# Altium PCB pcb.PcbDoc (part 1 of 6)
Units mm, origin at the board's own origin, x right, y up, seen from the top; angles counter-clockwise.
Board outline 163.6 x 137.4 mm, 4 copper layers (Top Layer, GND2, GND3, Bottom Layer), stack 1.586 mm thick; 362 components, 323 nets, 1261 pads, 657 vias.
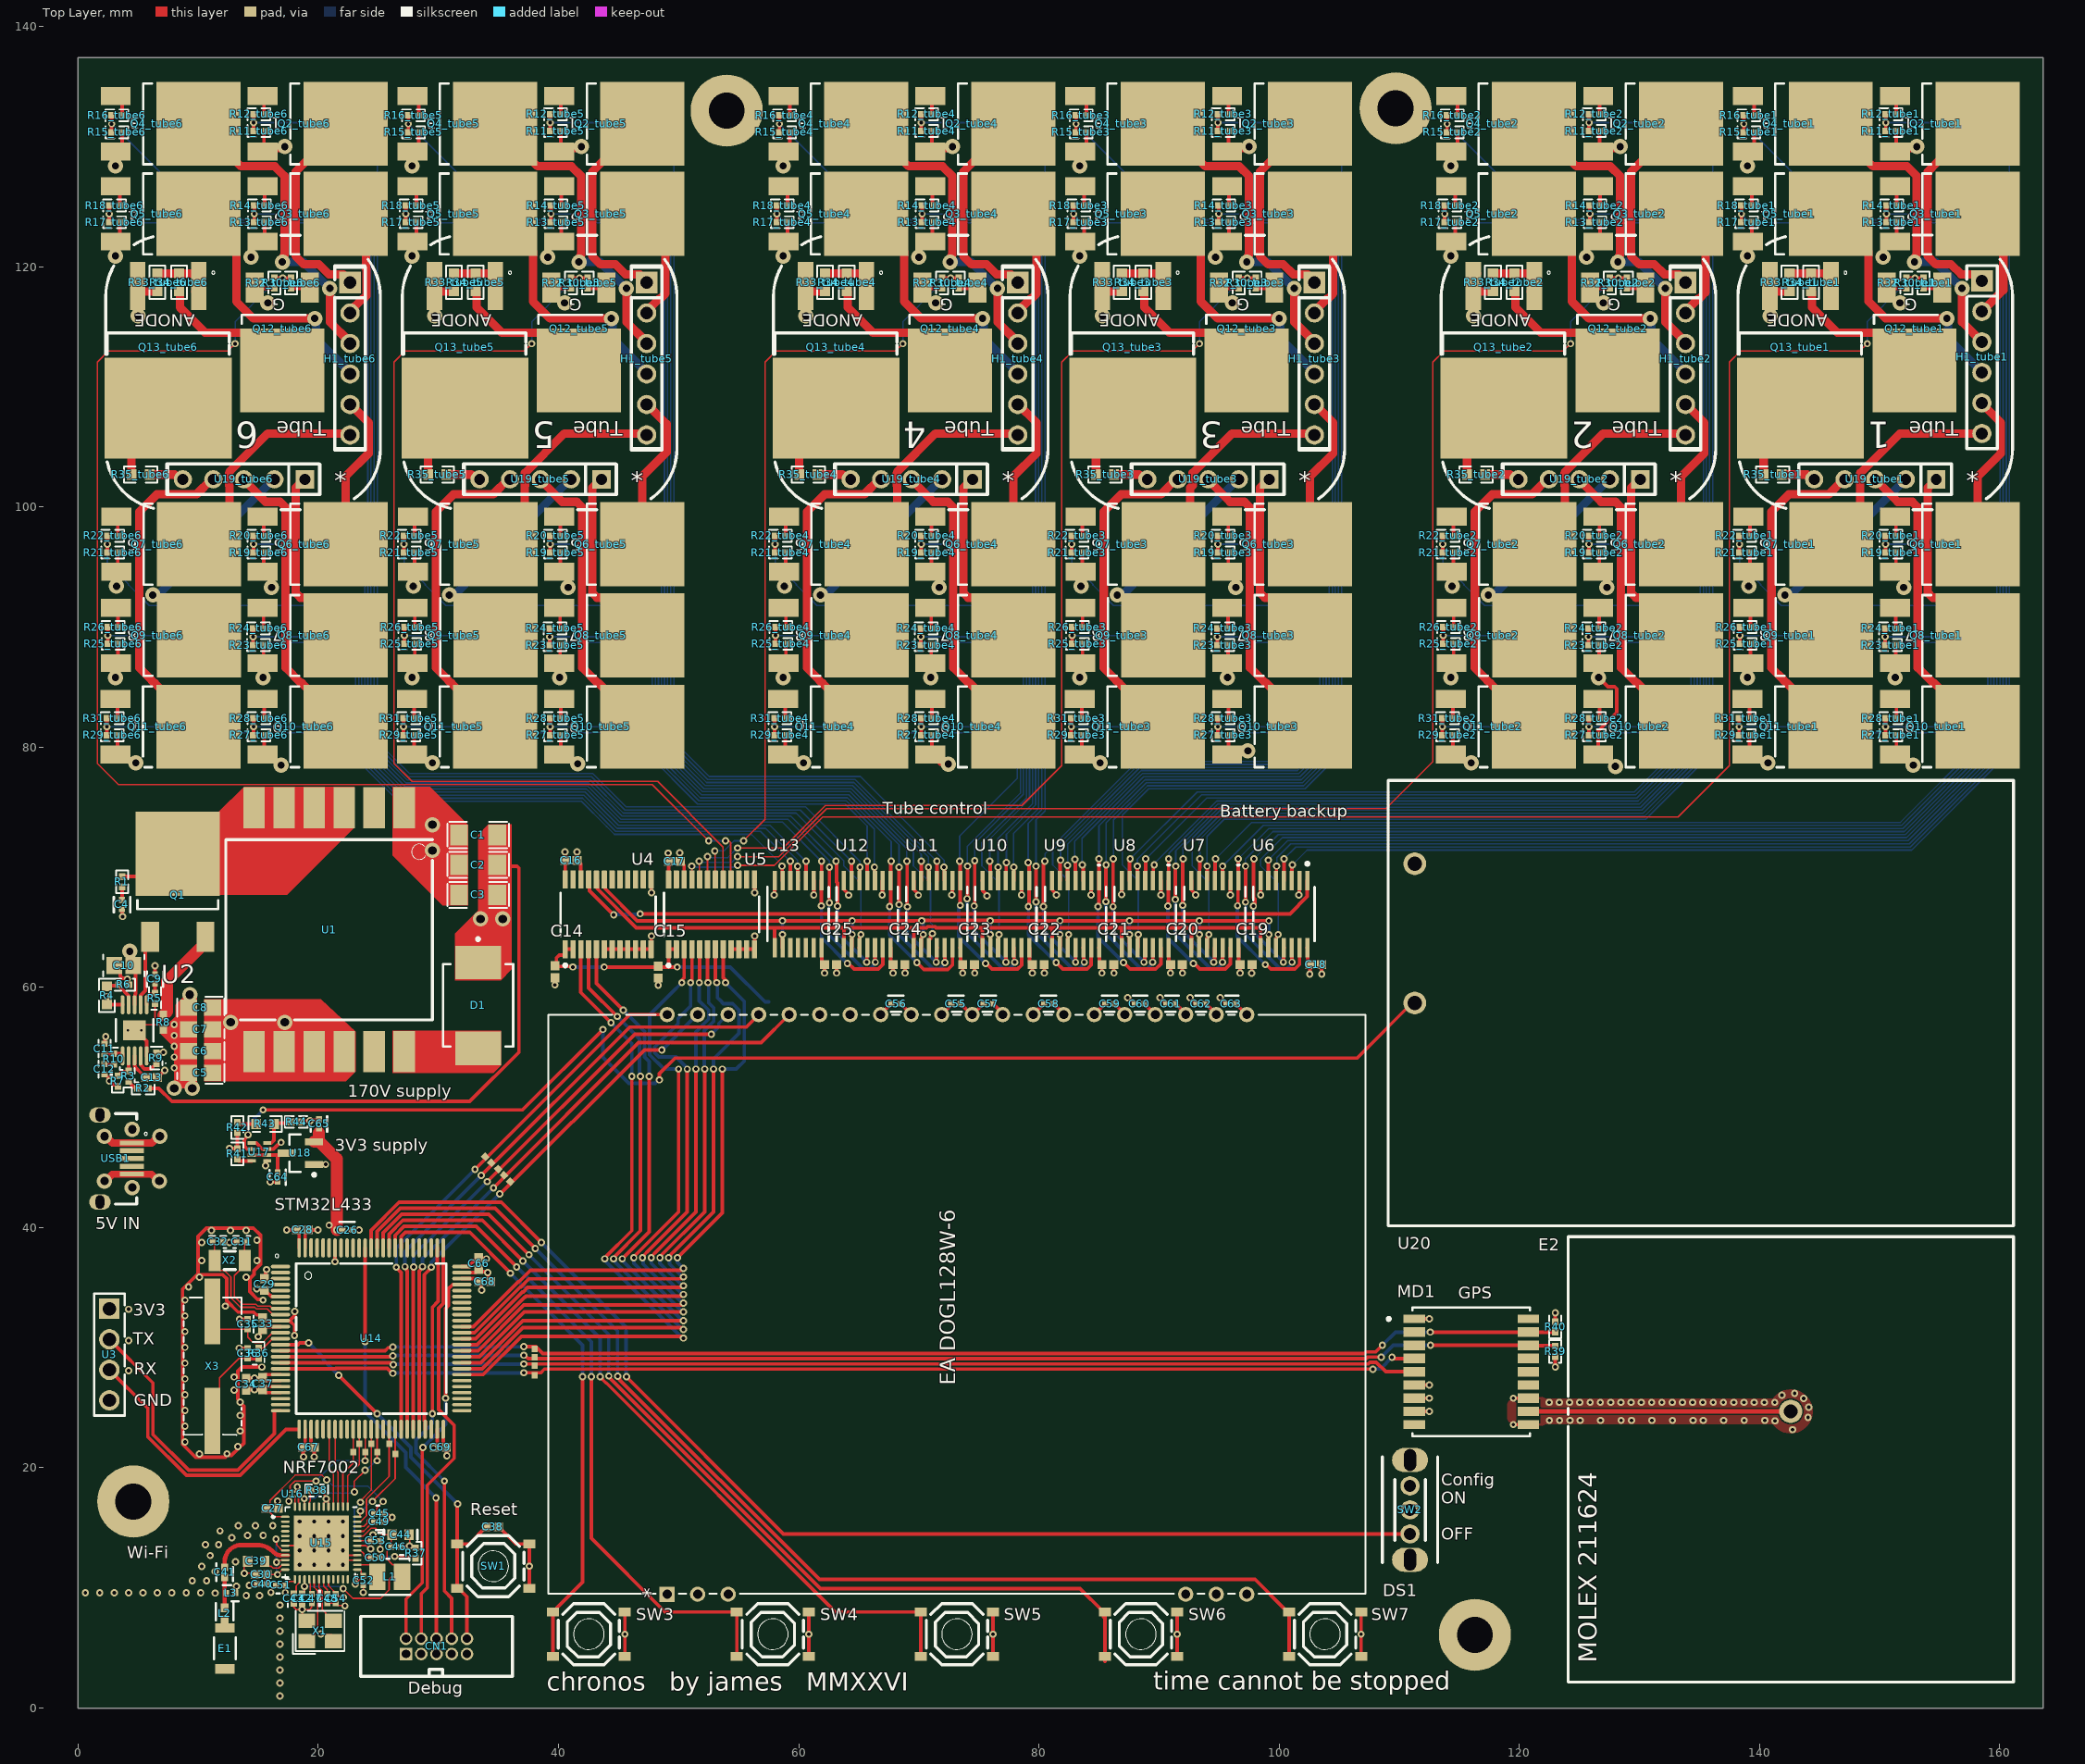
[diagram p0: Top Layer view]
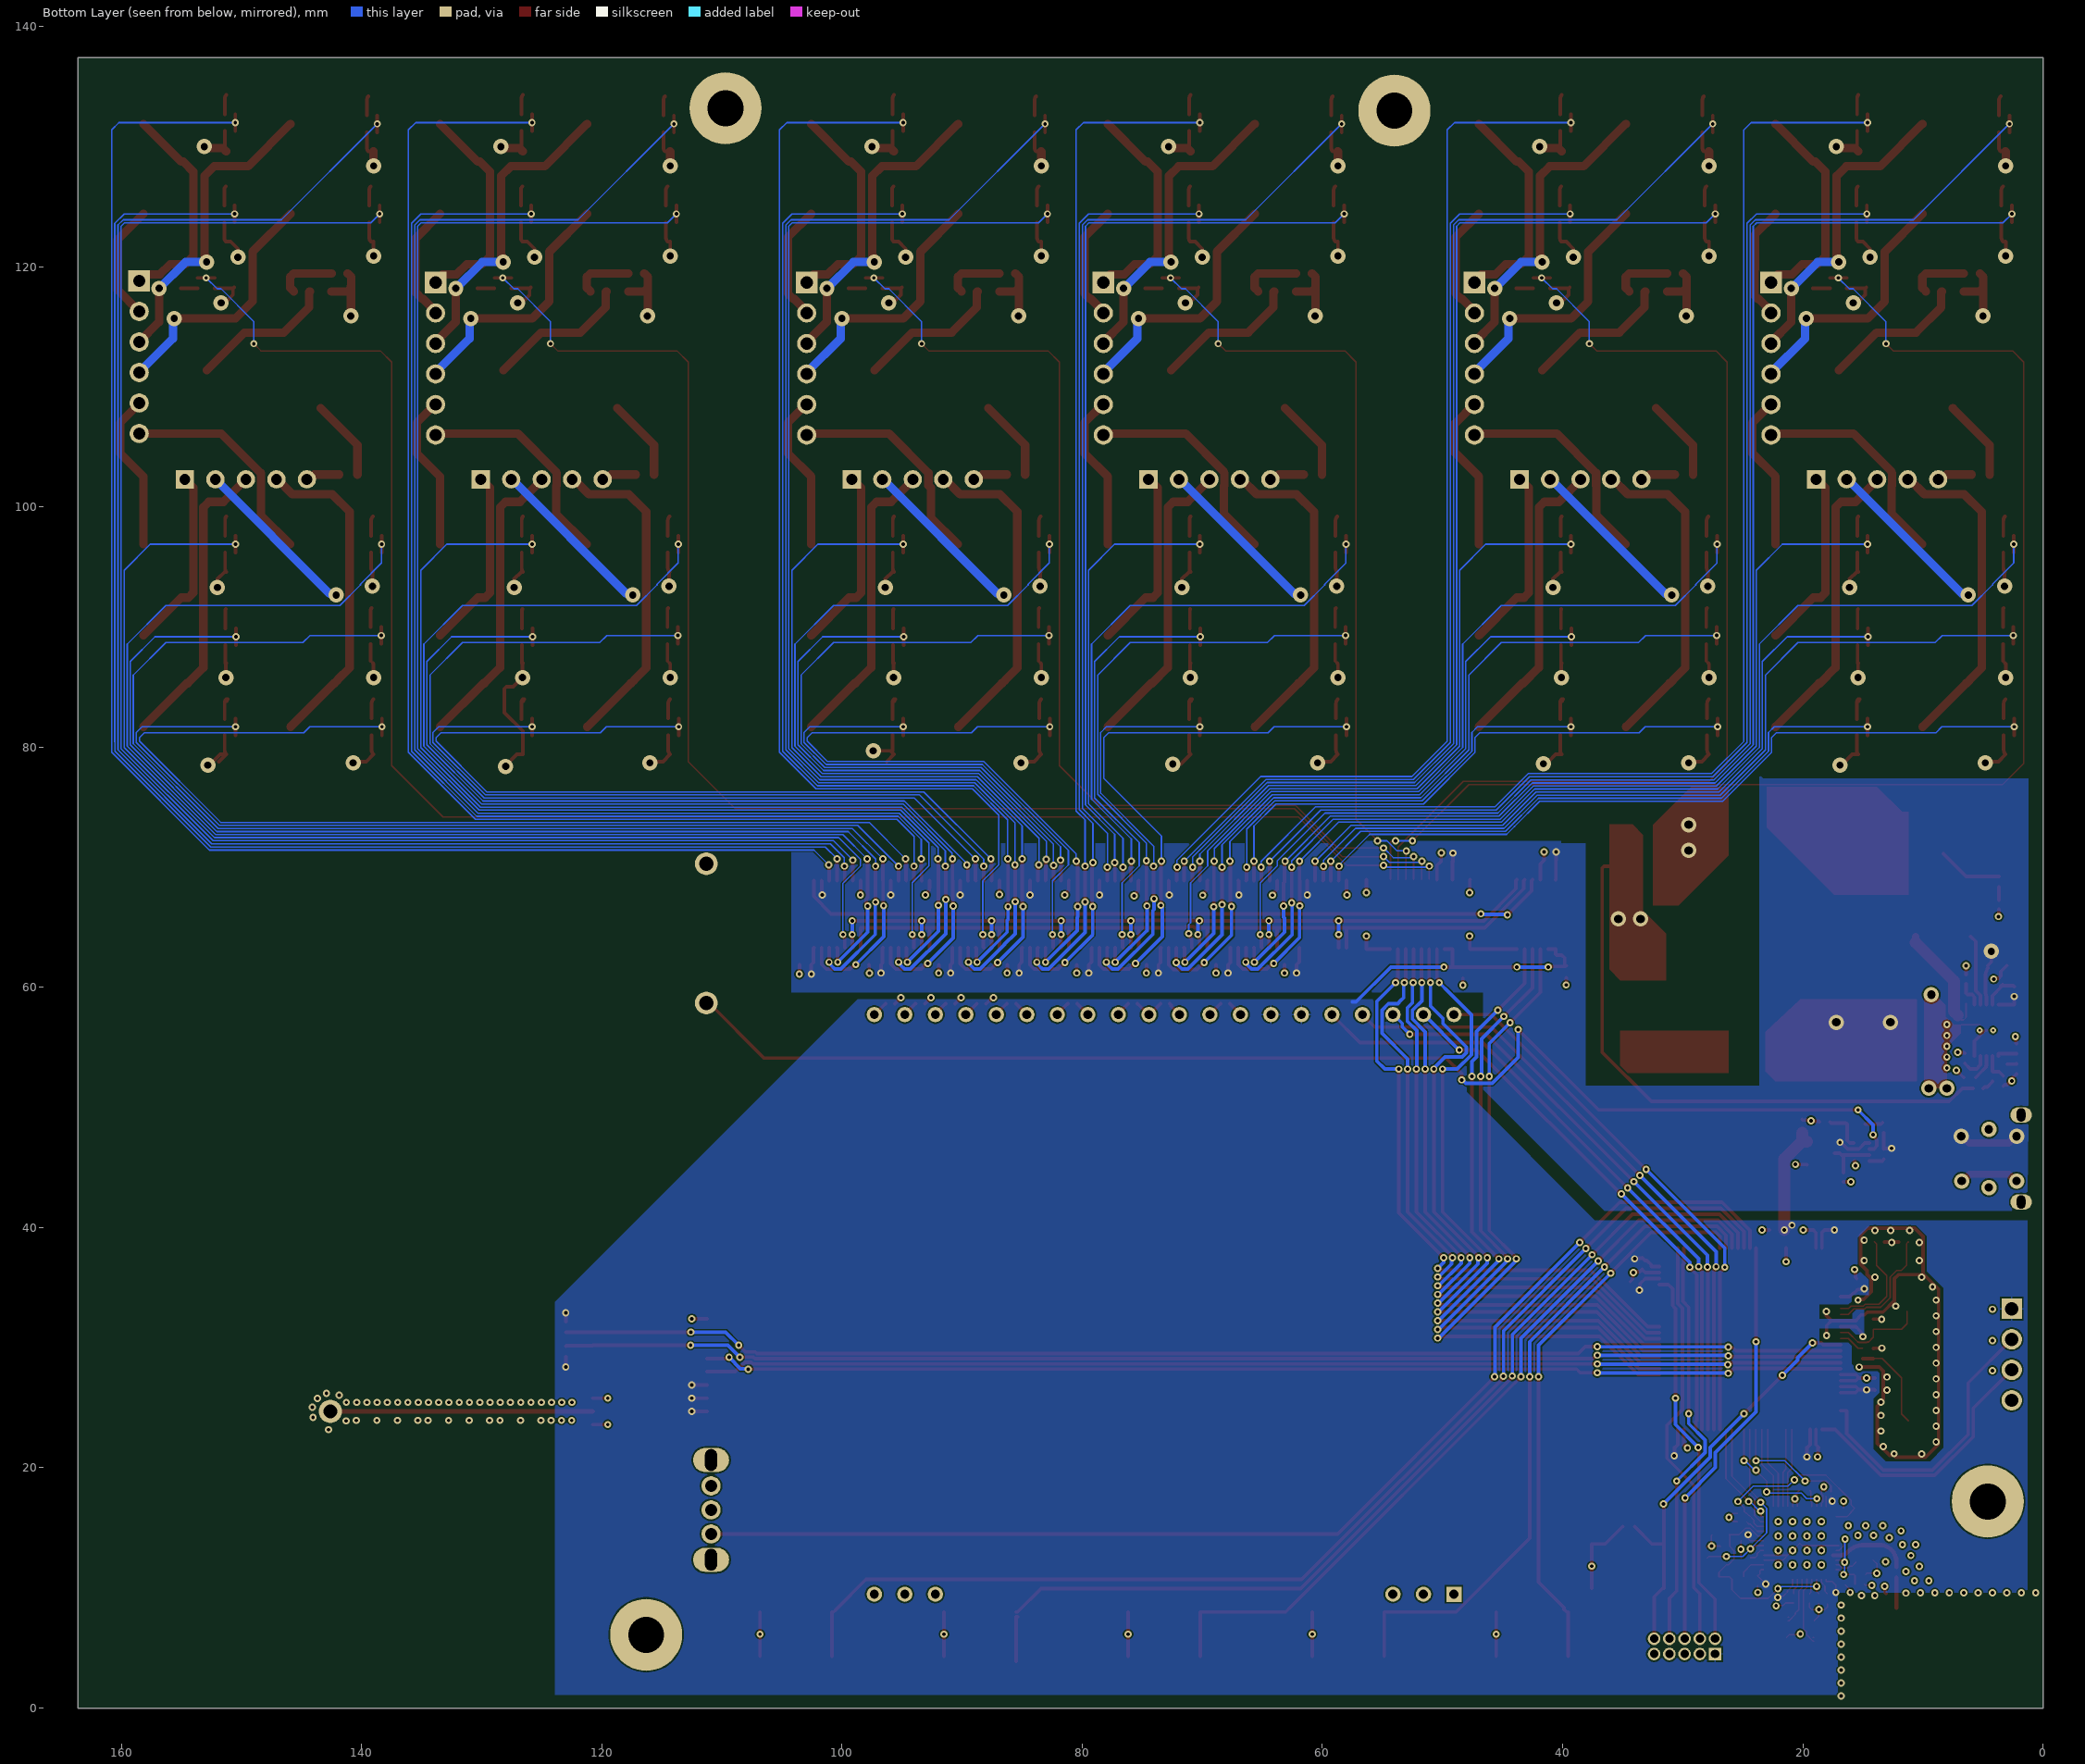
[diagram p1: Bottom Layer view, seen from below]
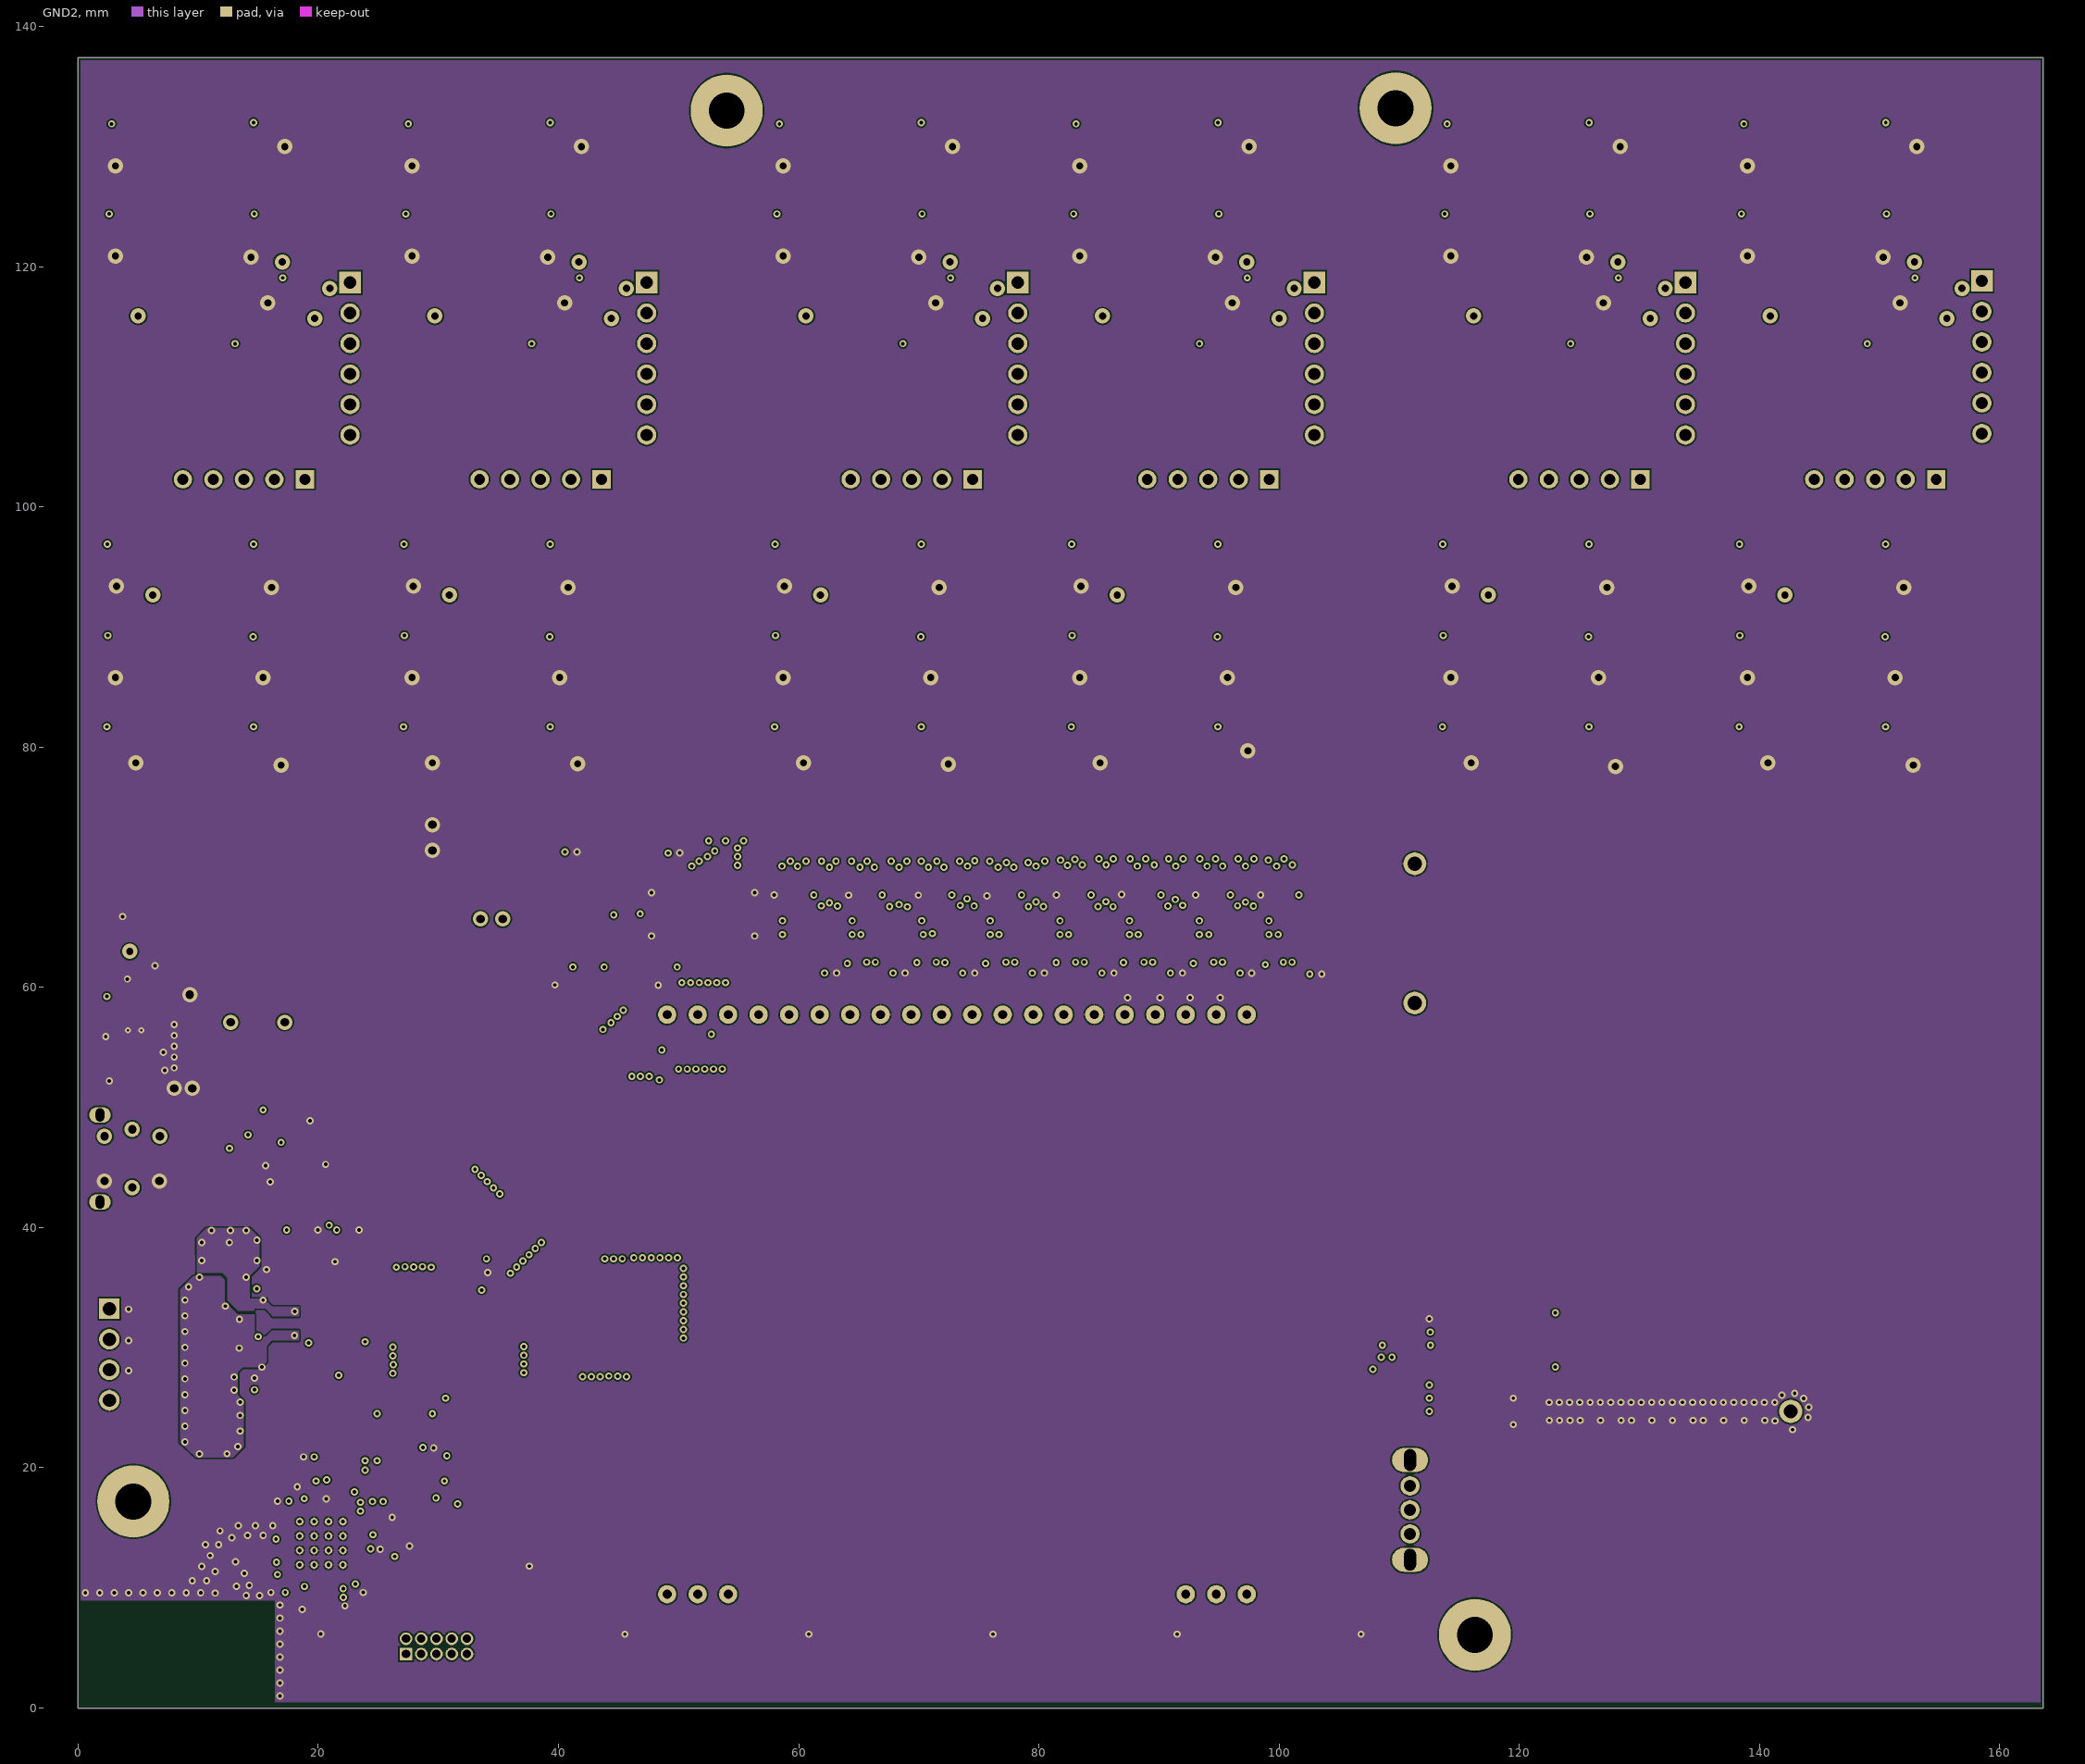
[diagram p2: GND2]
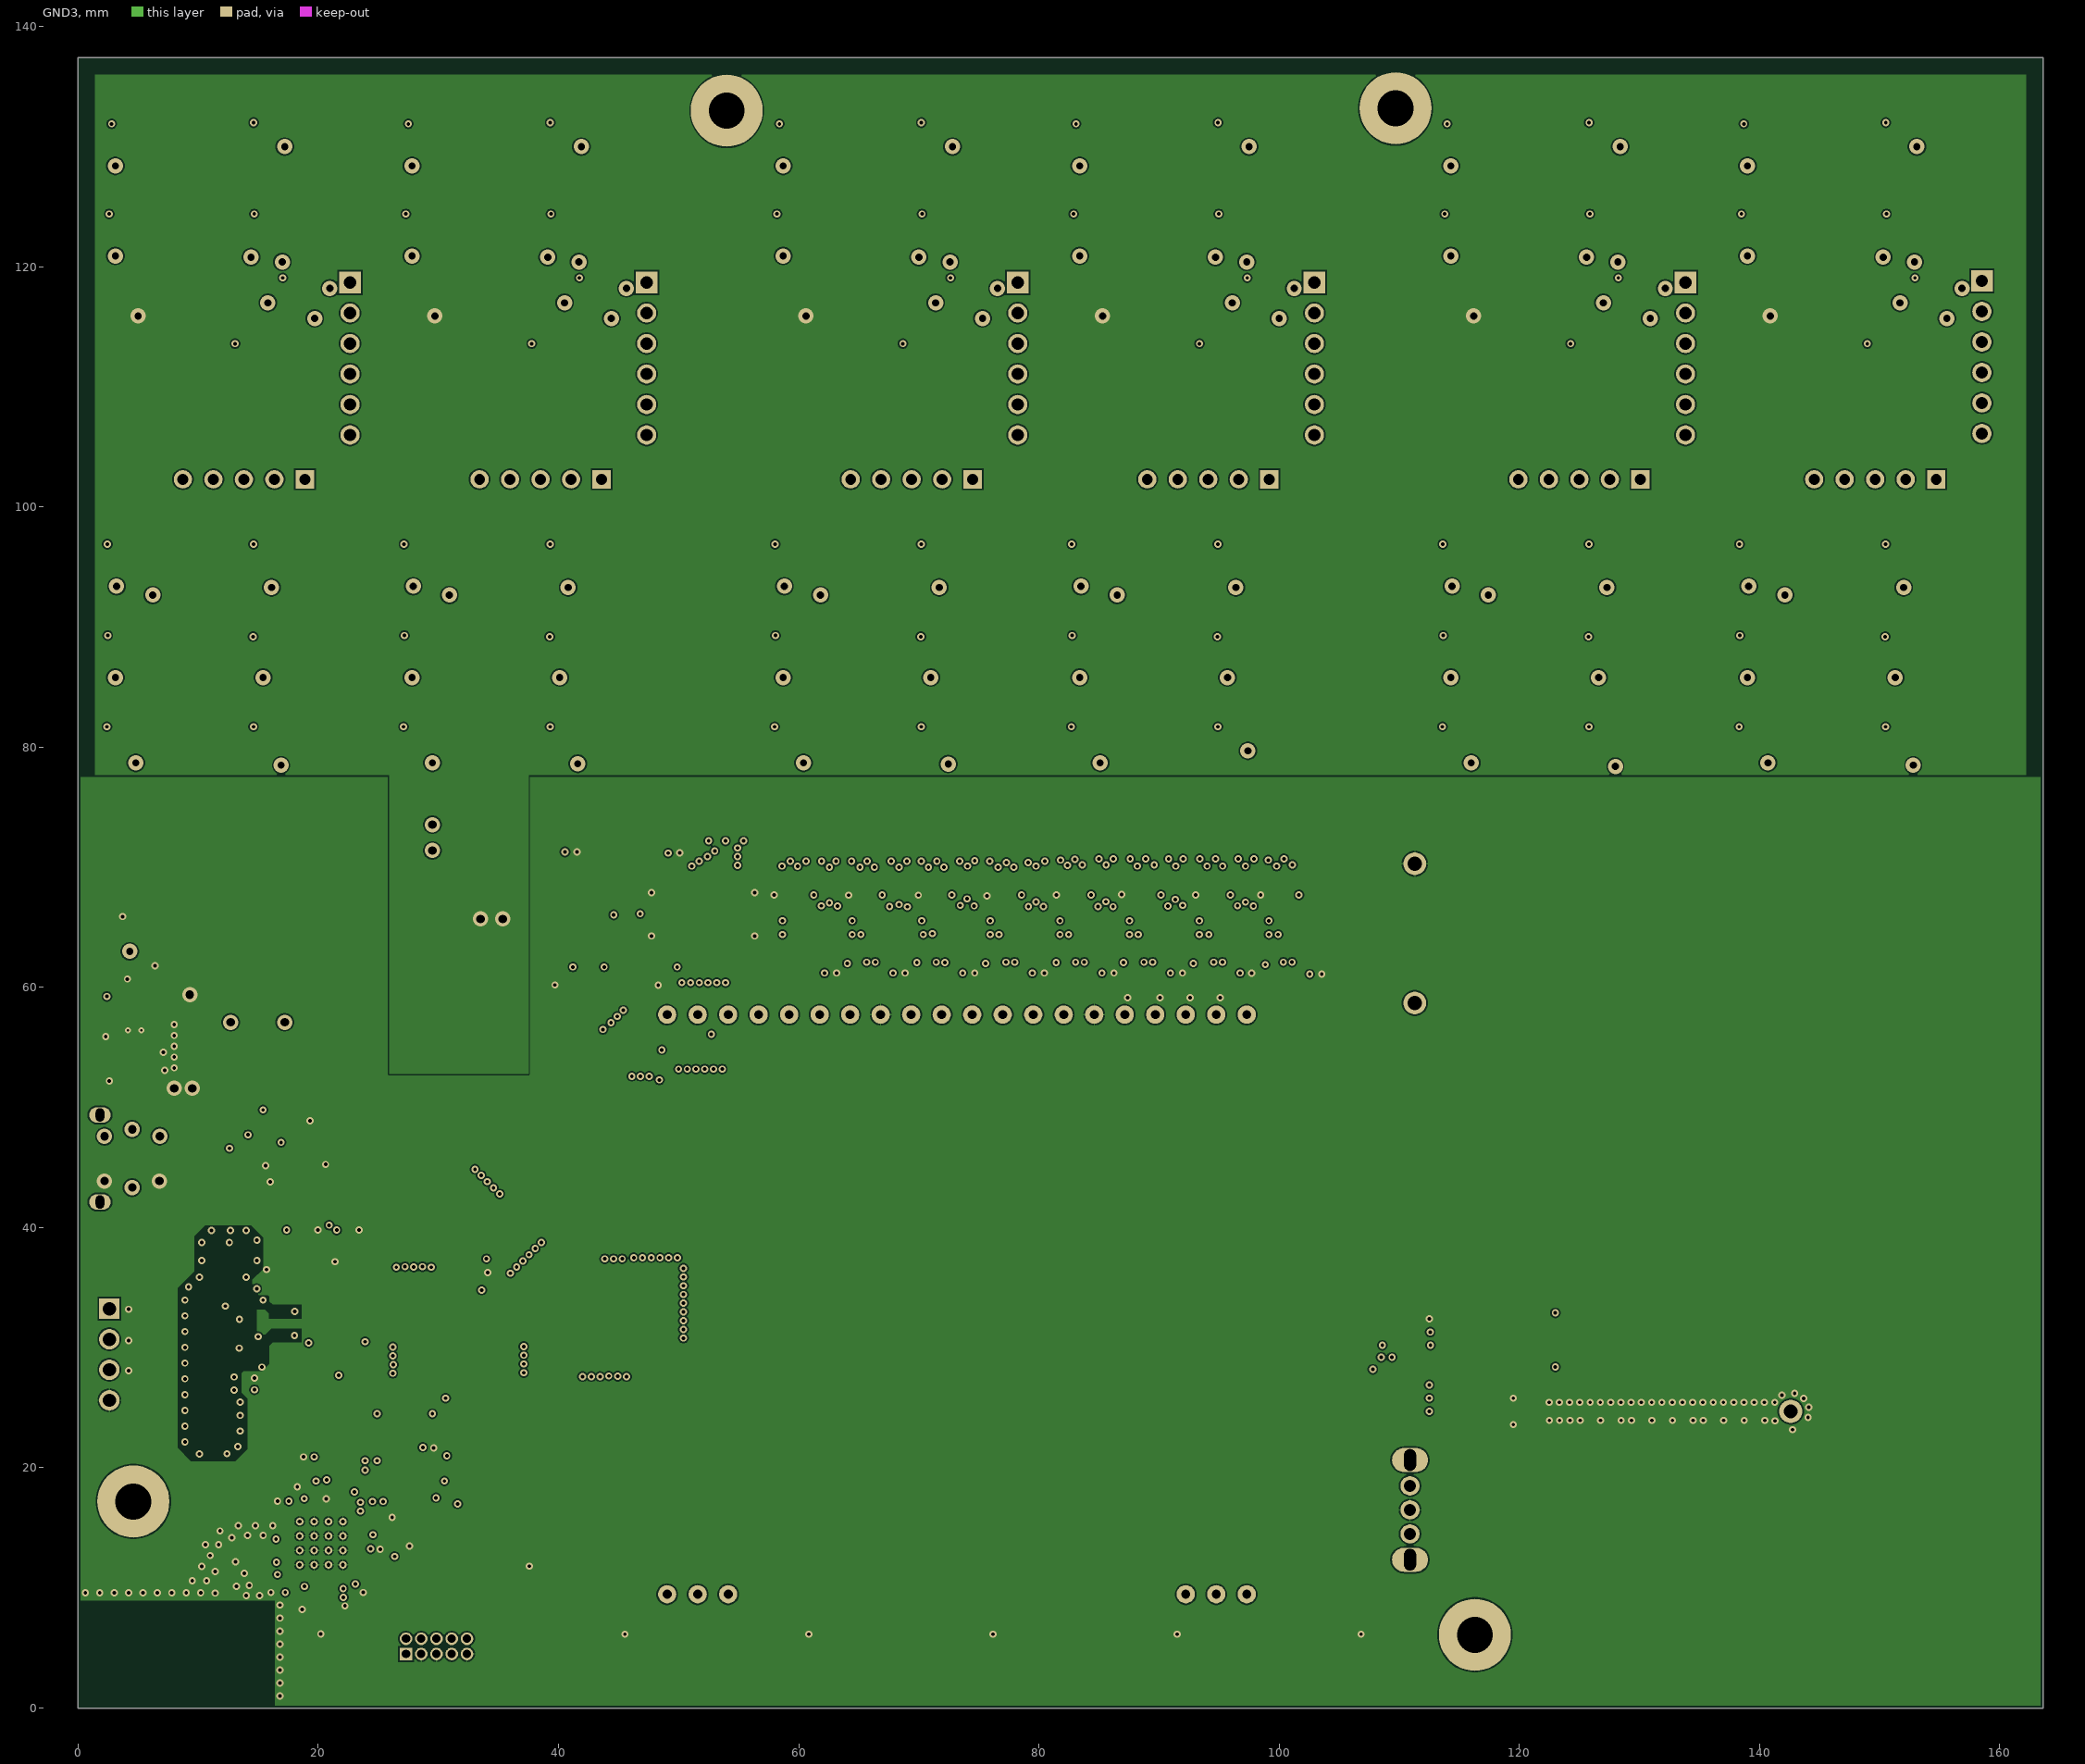
[diagram p3: GND3]

## Layer stack, top to bottom
Top Solder: solder mask 0.0102, Solder Resist, Dk 3.8
Top Layer: signal copper 0.035
Dielectric 2: prepreg 0.2103, PP-7628, Dk 4.4
GND2: signal copper 0.0152
Dielectric 1: core 1.065, FR-4, Dk 4.6
GND3: signal copper 0.0152
Dielectric 3: prepreg 0.2103, PP-7628, Dk 4.4
Bottom Layer: signal copper 0.035
Bottom Solder: solder mask 0.0102, Solder Resist, Dk 3.8

## Board outline
0,0 0,137.4 163.6,137.4 163.6,0

## Design rules (kind name [scope] priority, off if disabled: settings)
BoardOutlineClearance [All] p1: gap=0.2 ignorepadtopadclearanceinfootprint=FALSE
Clearance [All] p1: gap=0.127 ignorepadtopadclearanceinfootprint=FALSE except(0.25: Arc-Hole Track-Hole SMDPad-Hole THPad-Hole Via-Hole Fill-Hole Poly-Hole Region-Hole Text-Hole)
ComponentClearance [All] p1: gap=0.127 collisioncheckmode=3 verticalgap=0.127 showdistances=TRUE
DiffPairsRouting [All] p1: maxlimit=0.254 minlimit=0.127 mostfreqgap=0.254 toplayer_prefgap=0.127 toplayer_minwidth=0.127 toplayer_maxwidth=25.4 toplayer_prefwidth=0.127 midlayer1_mingap=0.254 midlayer1_minwidth=0.381 midlayer1_maxwidth=0.381 midlayer1_prefwidth=0.381 midlayer2_mingap=0.254 midlayer2_minwidth=0.381 midlayer2_maxwidth=0.381 midlayer2_prefwidth=0.381 bottomlayer_prefgap=0.127 bottomlayer_minwidth=0.127 bottomlayer_maxwidth=25.4 bottomlayer_prefwidth=0.127 maxuncoupledlength=12.7
Height [All] p1: minheight=0 maxheight=1816.048 prefheight=12.7
HoleSize [All] p1: absolutevalues=TRUE maxlimit=6.3 minlimit=0.15 maxpercent=80.000 minpercent=20.000
HoleToHoleClearance [All] p1: gap=0.25 allowstackedmicrovias=FALSE
MatchedLengths DEBUG_UART [InNetClass('DEBUG_UART')] p1: tolerance=25.4 checknetsindiffpair=FALSE checkdiffpairvsdiffpair=TRUE checkxsignals=TRUE checkothers=TRUE usedelayunits=TRUE delaytolerance=100.000000
MatchedLengths WIFI_QSPI [InNetClass('WIFI_QSPI')] p2: tolerance=25.4 checknetsindiffpair=FALSE checkdiffpairvsdiffpair=TRUE checkxsignals=TRUE checkothers=TRUE usedelayunits=TRUE delaytolerance=100.000000
MatchedLengths DEBUG [InNetClass('DEBUG')] p3: tolerance=25.4 checknetsindiffpair=FALSE checkdiffpairvsdiffpair=TRUE checkxsignals=TRUE checkothers=TRUE usedelayunits=TRUE delaytolerance=100.000000
MatchedLengths TUBE_CONTROL [InNetClass('TUBE_CONTROL')] p4: tolerance=25.4 checknetsindiffpair=FALSE checkdiffpairvsdiffpair=TRUE checkxsignals=TRUE checkothers=TRUE usedelayunits=TRUE delaytolerance=100.000000
MatchedLengths GPS_I2C [InNetClass('GPS_I2C')] p5: tolerance=25.4 checknetsindiffpair=FALSE checkdiffpairvsdiffpair=TRUE checkxsignals=TRUE checkothers=TRUE usedelayunits=TRUE delaytolerance=100.000000
MinimumAnnularRing [All] p1: minimumring=0.076
MinimumSolderMaskSliver [All] p1: minsoldermaskwidth=0
PlaneClearance [All] p1: clearance=0.127
PlaneConnect PlaneConnectPowerPads [InPadClass('PowerPads')] p1: planeconnectstyle=Direct reliefexpansion=0.508 reliefentries=4 reliefconductorwidth=0.254 reliefairgap=0.254
PlaneConnect [All] p2: pad.planeconnectstyle=Relief pad.reliefexpansion=0.3 pad.reliefentries=4 pad.reliefconductorwidth=0.127 pad.reliefairgap=0.127 via.planeconnectstyle=Direct via.reliefexpansion=0.3 via.reliefentries=4 via.reliefconductorwidth=0.127 via.reliefairgap=0.127
PolygonConnect PolygonConnectPowerPads [All vs (InPadClass('PowerPads'))] p1: connectstyle=Direct reliefconductorwidth=0.254 reliefentries=4 polygonreliefangle="90 Angle" airgapwidth=0.254
PolygonConnect [All] p2: thpad.connectstyle=Relief thpad.reliefconductorwidth=0.127 thpad.reliefentries=4 thpad.polygonreliefangle="90 Angle" thpad.airgapwidth=0.127 smdpad.connectstyle=Relief smdpad.reliefconductorwidth=0.127 smdpad.reliefentries=4 smdpad.polygonreliefangle="90 Angle" smdpad.airgapwidth=0.127 via.connectstyle=Direct via.reliefconductorwidth=0.127 via.reliefentries=4 via.polygonreliefangle="90 Angle" via.airgapwidth=0.127
RoomDefinition config-interface [InComponentClass('config-interface')] p1: confinementstyle=ConfineIn formatcopy=TRUE lockcomponents=FALSE outline 38.785,1.637 113.9,1.637 113.9,22 107.585,22 107.585,59.537 38.785,59.537
RoomDefinition gps [InComponentClass('gps')] p2: confinementstyle=ConfineIn formatcopy=TRUE lockcomponents=FALSE outline 162.4,1.3 120.6,1.3 120.6,21.467 108.5,21.467 108.5,34.198 123.455,34.198 123.455,39.8 162.4,39.8
RoomDefinition lv-supply [InComponentClass('lv-supply')] p3: confinementstyle=ConfineIn formatcopy=TRUE lockcomponents=FALSE outline 21.8,41.2 21.8,50.4 -2,50.4 -2,41.2
RoomDefinition tube-control [InComponentClass('tube-control')] p4: confinementstyle=ConfineIn formatcopy=TRUE lockcomponents=FALSE outline 104.335,72.281 38.9,72.281 38.9,60.1 104.335,60.1
RoomDefinition chronos-core [InComponentClass('chronos-core')] p5: confinementstyle=ConfineIn formatcopy=TRUE lockcomponents=FALSE outline 0.9,40.8 0.9,19.665 30.616,19.665 30.616,8.3 23.137,8.3 23.137,1.9 38.5,1.9 38.5,19.665 35.973,19.665 35.973,40.8
RoomDefinition wifi [InComponentClass('wifi')] p6: confinementstyle=ConfineIn formatcopy=TRUE lockcomponents=TRUE outline 6.9,0.9 22.6,0.9 22.6,9 28.7,9 28.7,19 6.9,19
RoomDefinition hv-supply [InComponentClass('hv-supply')] p7: confinementstyle=ConfineIn formatcopy=TRUE lockcomponents=FALSE outline 1.1,50.9 36.6,50.9 36.6,76.964 1.1,76.964
RoomDefinition tube1 [InComponentClass('tube1')] p8: confinementstyle=ConfineIn formatcopy=FALSE lockcomponents=TRUE outline 162.1,136 137.4,136 137.4,77.8 162.1,77.8
RoomDefinition tube5 [InComponentClass('tube5')] p9: confinementstyle=ConfineIn formatcopy=TRUE lockcomponents=TRUE outline 50.9,136 26.2,136 26.2,77.8 50.9,77.8
RoomDefinition tube6 [InComponentClass('tube6')] p10: confinementstyle=ConfineIn formatcopy=TRUE lockcomponents=TRUE outline 26.2,136 1.5,136 1.5,77.8 26.2,77.8
RoomDefinition tube4 [InComponentClass('tube4')] p11: confinementstyle=ConfineIn formatcopy=TRUE lockcomponents=TRUE outline 81.8,136 57.1,136 57.1,77.8 81.8,77.8
RoomDefinition tube3 [InComponentClass('tube3')] p12: confinementstyle=ConfineIn formatcopy=TRUE lockcomponents=TRUE outline 106.5,136 81.8,136 81.8,77.8 106.5,77.8
RoomDefinition tube2 [InComponentClass('tube2')] p13: confinementstyle=ConfineIn formatcopy=TRUE lockcomponents=TRUE outline 137.4,136 112.7,136 112.7,77.8 137.4,77.8
RoutingVias [All] p1: holewidth=0.3 width=0.6 viastyle="Through Hole" minholewidth=0.3 minwidth=0.6 maxholewidth=0.6 maxwidth=6.6
SilkToSilkClearance [All] p1: silktosilkclearance=0
SilkToSolderMaskClearance [IsPad] p1: minsilkscreentomaskgap=0.15 clearancetoexposedcopper=TRUE
SolderMaskExpansion [All] p1: expansion=0.075 istentingtop=FALSE
SupplyNets "Schematic Supply Nets_5" [InNet('GND')] p1: voltage=0.000
SupplyNets "Schematic Supply Nets_4" [InNet('3V3')] p2: voltage=0.000
SupplyNets "Schematic Supply Nets_1" [InNet('5V')] p3: voltage=0.000
SupplyNets "Schematic Supply Nets" [InNet('170V')] p4: voltage=0.000
Width Width_WIFI_QSPI [InNetClass('WIFI_QSPI')] p1: maxlimit=0.127 minlimit=0.127 preferedwidth=0.127
Width Width_WIFI_ANT [InNetClass('WIFI_ANT')] p2: maxlimit=0.367 minlimit=0.254 preferedwidth=0.367 toplayer_minwidth=0.3 bottomlayer_minwidth=0.3 impedanceprofiledriven=TRUE impedanceprofileid={E4F33DCF-E000-4C5C-904B-5986FE90C43B} impedanceprofilevalue=50.000000 minimp=50.000000 maximp=50.000000 favimp=50.000000
Width Width_GPS_ANT [InNet('GPS_ANTENNA')] p3: maxlimit=0.367 minlimit=0.254 preferedwidth=0.367 toplayer_minwidth=0.367 bottomlayer_minwidth=0.367 impedanceprofiledriven=TRUE impedanceprofileid={E4F33DCF-E000-4C5C-904B-5986FE90C43B} impedanceprofilevalue=50.000000 minimp=50.000000 maximp=50.000000 favimp=50.000000
Width [All] p4: maxlimit=25.4 minlimit=0.127 preferedwidth=0.3 minimp=50.000000 maximp=50.000000 favimp=50.000000
20 further rules are at their usual default settings.

## Classes and differential pairs
net class DEBUG: JTCK-SWCLK JTDI JTDO/TRACESWO JTMS-SWDIO
net class TUBE_CONTROL: GPIO_D10 GPIO_D11 GPIO_D12
net class GPS_I2C: GPS_I2C_SCL GPS_I2C_SDA
net class DEBUG_UART: DEBUG_UART_RX DEBUG_UART_TX
net class WIFI_QSPI: \WIFI_QSPI_CS WIFI_QSPI_CLK WIFI_QSPI_DATA0 WIFI_QSPI_DATA1 WIFI_QSPI_DATA2 WIFI_QSPI_DATA3
net class WIFI_ANT: NetC41_1 NetE1_1 RF_2.4GHZ
channel class tube-driver: tube1 tube2 tube3 tube4 tube5 tube6
net class CONFIG_BUTTON_[1..5]: CONFIG_BUTTON_1 CONFIG_BUTTON_2 CONFIG_BUTTON_3 CONFIG_BUTTON_4 CONFIG_BUTTON_5
component class wifi: C27 C30 C39 C40 C41 C42 C43 C44 C45 C46 C47 C48 C49 C50 C51 C52 C53 C54 E1 L1 L2 L3 R37 R38 U15 U16 X1
component class tube-control: C14 C15 C16 C17 C18 C19 C20 C21 C22 C23 C24 C25 U4 U5 U6 U7 U8 U9 U10 U11 U12 U13
component class tube6: H1_tube6 Q2_tube6 Q3_tube6 Q4_tube6 Q5_tube6 Q6_tube6 Q7_tube6 Q8_tube6 Q9_tube6 Q10_tube6 Q11_tube6 Q12_tube6 Q13_tube6 R11_tube6 R12_tube6 R13_tube6 R14_tube6 R15_tube6 R16_tube6 R17_tube6 R18_tube6 R19_tube6 R20_tube6 R21_tube6 R22_tube6 R23_tube6 R24_tube6 R25_tube6 R26_tube6 R27_tube6 R28_tube6 R29_tube6 R30_tube6 R31_tube6 R32_tube6 R33_tube6 R34_tube6 R35_tube6 U19_tube6
component class tube5: H1_tube5 Q2_tube5 Q3_tube5 Q4_tube5 Q5_tube5 Q6_tube5 Q7_tube5 Q8_tube5 Q9_tube5 Q10_tube5 Q11_tube5 Q12_tube5 Q13_tube5 R11_tube5 R12_tube5 R13_tube5 R14_tube5 R15_tube5 R16_tube5 R17_tube5 R18_tube5 R19_tube5 R20_tube5 R21_tube5 R22_tube5 R23_tube5 R24_tube5 R25_tube5 R26_tube5 R27_tube5 R28_tube5 R29_tube5 R30_tube5 R31_tube5 R32_tube5 R33_tube5 R34_tube5 R35_tube5 U19_tube5
component class tube4: H1_tube4 Q2_tube4 Q3_tube4 Q4_tube4 Q5_tube4 Q6_tube4 Q7_tube4 Q8_tube4 Q9_tube4 Q10_tube4 Q11_tube4 Q12_tube4 Q13_tube4 R11_tube4 R12_tube4 R13_tube4 R14_tube4 R15_tube4 R16_tube4 R17_tube4 R18_tube4 R19_tube4 R20_tube4 R21_tube4 R22_tube4 R23_tube4 R24_tube4 R25_tube4 R26_tube4 R27_tube4 R28_tube4 R29_tube4 R30_tube4 R31_tube4 R32_tube4 R33_tube4 R34_tube4 R35_tube4 U19_tube4
component class tube3: H1_tube3 Q2_tube3 Q3_tube3 Q4_tube3 Q5_tube3 Q6_tube3 Q7_tube3 Q8_tube3 Q9_tube3 Q10_tube3 Q11_tube3 Q12_tube3 Q13_tube3 R11_tube3 R12_tube3 R13_tube3 R14_tube3 R15_tube3 R16_tube3 R17_tube3 R18_tube3 R19_tube3 R20_tube3 R21_tube3 R22_tube3 R23_tube3 R24_tube3 R25_tube3 R26_tube3 R27_tube3 R28_tube3 R29_tube3 R30_tube3 R31_tube3 R32_tube3 R33_tube3 R34_tube3 R35_tube3 U19_tube3
component class tube2: H1_tube2 Q2_tube2 Q3_tube2 Q4_tube2 Q5_tube2 Q6_tube2 Q7_tube2 Q8_tube2 Q9_tube2 Q10_tube2 Q11_tube2 Q12_tube2 Q13_tube2 R11_tube2 R12_tube2 R13_tube2 R14_tube2 R15_tube2 R16_tube2 R17_tube2 R18_tube2 R19_tube2 R20_tube2 R21_tube2 R22_tube2 R23_tube2 R24_tube2 R25_tube2 R26_tube2 R27_tube2 R28_tube2 R29_tube2 R30_tube2 R31_tube2 R32_tube2 R33_tube2 R34_tube2 R35_tube2 U19_tube2
component class tube1: H1_tube1 Q2_tube1 Q3_tube1 Q4_tube1 Q5_tube1 Q6_tube1 Q7_tube1 Q8_tube1 Q9_tube1 Q10_tube1 Q11_tube1 Q12_tube1 Q13_tube1 R11_tube1 R12_tube1 R13_tube1 R14_tube1 R15_tube1 R16_tube1 R17_tube1 R18_tube1 R19_tube1 R20_tube1 R21_tube1 R22_tube1 R23_tube1 R24_tube1 R25_tube1 R26_tube1 R27_tube1 R28_tube1 R29_tube1 R30_tube1 R31_tube1 R32_tube1 R33_tube1 R34_tube1 R35_tube1 U19_tube1
component class lv-supply: C64 C65 R41 R42 R43 R44 U17 U18 U20 USB1
component class hv-supply: C1 C2 C3 C4 C5 C6 C7 C8 C9 C10 C11 C12 C13 D1 Q1 R1 R2 R3 R4 R5 R6 R7 R8 R9 R10 U1 U2
component class gps: E2 MD1 R39 R40
component class config-interface: C55 C56 C57 C58 C59 C60 C61 C62 C63 DS1 SW2 SW3 SW4 SW5 SW6 SW7
component class chronos-core: C26 C28 C29 C31 C32 C33 C34 C35 C36 C37 C38 C66 C67 C68 C69 CN1 R36 SW1 U3 U14 X2 X3

## Components (designator, comment, footprint, x,y, rotation, side; value= is the part's Value field where it differs from the comment)
C1 "1206B224K251NT" 1206B224K251NT 33.3,72.7 r0 top value=220nF
C2 "1206B224K251NT" 1206B224K251NT 33.3,70.2 r0 top value=220nF
C3 "1206B224K251NT" 1206B224K251NT 33.3,67.7 r0 top value=220nF
C4 "CL05B332KB5NNNC" FP-CL388-IPC_C 3.65,66.9 r90 top
C5 "CL21A476MQYNNNE" CL21A476MQYNNNE 10.2,52.9 r180 top value=47uF
C6 "CL21A476MQYNNNE" CL21A476MQYNNNE 10.2,54.7 r180 top value=47uF
C7 "CL21A476MQYNNNE" CL21A476MQYNNNE 10.2,56.5 r180 top value=47uF
C8 "CL21A476MQYNNNE" CL21A476MQYNNNE 10.2,58.3 r180 top value=47uF
C9 "CL05B103KB5NNNC" FP-CL165-IPC_C 6.4,60.7 r270 top
C10 "CL21A476MQYNNNE" "CAP 0805_2012" 3.8,61.825 r0 top value="47 µF"
C11 "0402CG101J500NT" 0402CG101J500NT 2.2,54.9 r270 top value=100pF
C12 "0402B223K500NT" 0402B223K500NT 2.2,53.2 r90 top value=22nF
C13 "CL05B104KO5NNNC" CAPC1050X55X23ML05T13 6.1,52.5 r0 top value=100nF
C14 "CL05B104KO5NNNC" CAPC1050X55X23ML05T13 39.7,61.3 r90 top
C15 "CL05B104KO5NNNC" CAPC1050X55X23ML05T13 48.3,61.275 r90 top
C16 "CL05B104KO5NNNC" CAPC1050X55X23ML05T13 41.035,70.581 r180 top
C17 "CL05B104KO5NNNC" CAPC1050X55X23ML05T13 49.635,70.481 r180 top
C18 "CL05B104KO5NNNC" CAPC1050X55X23ML05T13 103.05,61.9 r180 top
C19 "CL05B104KO5NNNC" CAPC1050X55X23ML05T13 97.25,61.9 r180 top
C20 "CL05B104KO5NNNC" CAPC1050X55X23ML05T13 91.45,61.9 r180 top
C21 "CL05B104KO5NNNC" CAPC1050X55X23ML05T13 85.74,61.9 r180 top
C22 "CL05B104KO5NNNC" CAPC1050X55X23ML05T13 79.94,61.9 r180 top
C23 "CL05B104KO5NNNC" CAPC1050X55X23ML05T13 74.14,61.9 r180 top
C24 "CL05B104KO5NNNC" CAPC1050X55X23ML05T13 68.35,61.9 r180 top
C25 "CL05B104KO5NNNC" CAPC1050X55X23ML05T13 62.65,61.9 r180 top
C26 "CL05A475MP5NRNC" FP-CL282-IPC_C 22.4,39.8 r0 top
C27 "CL05B104KO5NNNC" CAPC1050X55X23ML05T13 16.148,16.623 r0 top
C28 "CL05B104KO5NNNC" CAPC1050X55X23ML05T13 18.659,39.81 r0 top
C29 "CL05B104KO5NNNC" CAPC1050X55X23ML05T13 15.514,35.265 r90 top
C30 "CL05B104KO5NNNC" CAPC1050X55X23ML05T13 15.248,11.123 r0 top
C31 "0402CG220J500NT" 0402CG220J500NT 13.614,38.815 r0 top value=22pF
C32 "0402CG220J500NT" 0402CG220J500NT 11.614,38.815 r180 top value=22pF
C33 "CL05B104KO5NNNC" CAPC1050X55X23ML05T13 15.359,32.01 r90 top
C34 "CL05B104KO5NNNC" CAPC1050X55X23ML05T13 13.99,26.965 r90 top
C35 "0402CG220J500NT" 0402CG220J500NT 14.114,31.965 r270 top value=22pF
C36 "0402CG330J500NT" 0402CG330J500NT 14.114,29.53 r270 top value=33pF
C37 "CL05B104KO5NNNC" CAPC1050X55X23ML05T13 15.359,27.01 r90 top
C38 "CL05B104KO5NNNC" CAPC1050X55X23ML05T13 34.5,15.1 r0 top
C39 "CL10B474KA8NNNC" CL10B474KA8NNNC 14.827,12.223 r180 top value=470nF
C40 "CL05A475MP5NRNC" FP-CL282-IPC_C 15.27,10.323 r180 top
C41 "GJM1555C1H1R0BB01D" FP-GJM155-0_05-IPC_B 12.202,11.302 r90 top
C42 "CL05B224KO5NNNC" CL05B224KO5NNNC 18.648,9.123 r270 top value=220nF
C43 "0402B223K500NT" 0402B223K500NT 17.948,9.123 r270 top value=22nF
C44 "CL10B474KA8NNNC" CL10B474KA8NNNC 26.848,14.423 r0 top value=470nF
C45 "CL05A225MQ5NSNC" FP-CL50-IPC_C 25.048,16.198 r0 top
C46 "CL05A475MP5NRNC" FP-CL282-IPC_C 26.448,13.423 r0 top
C47 "CL05A225MQ5NSNC" FP-CL50-IPC_C 19.448,9.123 r270 top
C48 "CL05A105KA5NQNC" FP-CL542-IPC_C 20.748,9.123 r270 top
C49 "CL05A105KA5NQNC" FP-CL542-IPC_C 25.048,15.498 r0 top
C50 "CL05B103KB5NNNC" FP-CL165-IPC_C 24.748,12.523 r0 top
C51 "CL05A475MP5NRNC" FP-CL282-IPC_C 16.848,10.223 r180 top
C52 "CL05A475MP5NRNC" FP-CL282-IPC_C 23.748,10.623 r270 top
C53 "CL05A225MQ5NSNC" FP-CL50-IPC_C 24.748,13.923 r0 top
C54 "CL05A105KA5NQNC" FP-CL542-IPC_C 21.448,9.123 r270 top
C55 "CL05A105KA5NQNC" FP-CL542-IPC_C 73.085,58.637 r0 top
C56 "CL05A105KA5NQNC" FP-CL542-IPC_C 68.085,58.637 r180 top
C57 "CL05A105KA5NQNC" FP-CL542-IPC_C 75.785,58.637 r0 top
C58 "CL05A105KA5NQNC" FP-CL542-IPC_C 80.807,58.637 r0 top
C59 "CL05A105KA5NQNC" FP-CL542-IPC_C 85.885,58.637 r180 top
C60 "CL05A105KA5NQNC" FP-CL542-IPC_C 88.385,58.637 r180 top
C61 "CL05A105KA5NQNC" FP-CL542-IPC_C 90.985,58.637 r180 top
C62 "CL05A105KA5NQNC" FP-CL542-IPC_C 93.485,58.637 r180 top
C63 "CL05A105KA5NQNC" FP-CL542-IPC_C 95.985,58.637 r180 top
C64 "CL05A105KA5NQNC" FP-CL542-IPC_C 16.6,44.2 r90 top
C65 "CL05A105KA5NQNC" FP-CL542-IPC_C 20.055,48.628 r270 top
C66 "CL05B104KO5NNNC" CAPC1050X55X23ML05T13 33.359,37.01 r270 top
C67 "CL05B104KO5NNNC" CAPC1050X55X23ML05T13 19.159,21.71 r180 top
C68 "CL05B104KO5NNNC" CAPC1050X55X23ML05T13 33.859,35.51 r0 top
C69 "CL05B104KO5NNNC" CAPC1050X55X23ML05T13 30.159,21.71 r180 top
CN1 "HX JN1.27-2x5P ZZ H4.9" "HX JN1.27-2x5P ZZ H4.9" 29.84,5.135 r0 top
D1 "MBRS3201T3G" ONSC-SMC-2-403-03_V 33.3,58.5 r270 top
DS1 "EA DOGL128W-6" "EA DOGL128W-6" 72.285,34.75 r90 top
E1 "2450AT18A100E" JT-2450AT18A100-2_V 12.223,4.973 r270 top
E2 "Molex 2116240001" Molex_GPS_L1_L5_GLONASS_36MM_STACKED_2116240001 142.6,20.7 r0 top
H1_tube1 "2.54-1_6P" 2.54-1_6P 158.519,112.47 r270 top (schematic designator H1)
H1_tube2 "2.54-1_6P" 2.54-1_6P 133.839,112.343 r270 top (schematic designator H1)
H1_tube3 "2.54-1_6P" 2.54-1_6P 102.939,112.343 r270 top (schematic designator H1)
H1_tube4 "2.54-1_6P" 2.54-1_6P 78.239,112.343 r270 top (schematic designator H1)
H1_tube5 "2.54-1_6P" 2.54-1_6P 47.339,112.343 r270 top (schematic designator H1)
H1_tube6 "2.54-1_6P" 2.54-1_6P 22.639,112.343 r270 top (schematic designator H1)
L1 "LQM2HPN3R3MGCL" FP-LQM2HPN_G0-IPC_B 25.948,10.923 r0 top
L2 "LQG15HS3N9S02D" FP-LQG15HH_02-IPC_A 12.202,7.873 r90 top
L3 "LQG15HS2N7S02D" FP-LQG15HH_02-IPC_C 12.702,9.573 r0 top
MD1 "MAX-M10S-00B" FP-MAX-M10S-00B-MFG 116,28 r0 top
Q1 "IRFR220NTRPBF" FP-PG-TO252-3-MFG 8.3,68.8 r0 top
Q2_tube1 "IRFR220NTRPBF" FP-PG-TO252-3-MFG 155.844,131.9 r270 top (schematic designator Q2)
Q2_tube2 "IRFR220NTRPBF" FP-PG-TO252-3-MFG 131.144,131.9 r270 top (schematic designator Q2)
Q2_tube3 "IRFR220NTRPBF" FP-PG-TO252-3-MFG 100.244,131.9 r270 top (schematic designator Q2)
Q2_tube4 "IRFR220NTRPBF" FP-PG-TO252-3-MFG 75.544,131.9 r270 top (schematic designator Q2)
Q2_tube5 "IRFR220NTRPBF" FP-PG-TO252-3-MFG 44.644,131.9 r270 top (schematic designator Q2)
Q2_tube6 "IRFR220NTRPBF" FP-PG-TO252-3-MFG 19.944,131.9 r270 top (schematic designator Q2)
Q3_tube1 "IRFR220NTRPBF" FP-PG-TO252-3-MFG 155.844,124.4 r270 top (schematic designator Q3)
Q3_tube2 "IRFR220NTRPBF" FP-PG-TO252-3-MFG 131.144,124.4 r270 top (schematic designator Q3)
Q3_tube3 "IRFR220NTRPBF" FP-PG-TO252-3-MFG 100.244,124.4 r270 top (schematic designator Q3)
Q3_tube4 "IRFR220NTRPBF" FP-PG-TO252-3-MFG 75.544,124.4 r270 top (schematic designator Q3)
Q3_tube5 "IRFR220NTRPBF" FP-PG-TO252-3-MFG 44.644,124.4 r270 top (schematic designator Q3)
Q3_tube6 "IRFR220NTRPBF" FP-PG-TO252-3-MFG 19.944,124.4 r270 top (schematic designator Q3)
Q4_tube1 "IRFR220NTRPBF" FP-PG-TO252-3-MFG 143.6,131.9 r270 top (schematic designator Q4)
Q4_tube2 "IRFR220NTRPBF" FP-PG-TO252-3-MFG 118.9,131.9 r270 top (schematic designator Q4)
Q4_tube3 "IRFR220NTRPBF" FP-PG-TO252-3-MFG 88,131.9 r270 top (schematic designator Q4)
Q4_tube4 "IRFR220NTRPBF" FP-PG-TO252-3-MFG 63.3,131.9 r270 top (schematic designator Q4)
Q4_tube5 "IRFR220NTRPBF" FP-PG-TO252-3-MFG 32.4,131.9 r270 top (schematic designator Q4)
Q4_tube6 "IRFR220NTRPBF" FP-PG-TO252-3-MFG 7.7,131.9 r270 top (schematic designator Q4)
Q5_tube1 "IRFR220NTRPBF" FP-PG-TO252-3-MFG 143.6,124.4 r270 top (schematic designator Q5)
Q5_tube2 "IRFR220NTRPBF" FP-PG-TO252-3-MFG 118.9,124.4 r270 top (schematic designator Q5)
Q5_tube3 "IRFR220NTRPBF" FP-PG-TO252-3-MFG 88,124.4 r270 top (schematic designator Q5)
Q5_tube4 "IRFR220NTRPBF" FP-PG-TO252-3-MFG 63.3,124.4 r270 top (schematic designator Q5)
Q5_tube5 "IRFR220NTRPBF" FP-PG-TO252-3-MFG 32.4,124.4 r270 top (schematic designator Q5)
Q5_tube6 "IRFR220NTRPBF" FP-PG-TO252-3-MFG 7.7,124.4 r270 top (schematic designator Q5)
Q6_tube1 "IRFR220NTRPBF" FP-PG-TO252-3-MFG 155.844,96.9 r270 top (schematic designator Q6)
Q6_tube2 "IRFR220NTRPBF" FP-PG-TO252-3-MFG 131.144,96.9 r270 top (schematic designator Q6)
Q6_tube3 "IRFR220NTRPBF" FP-PG-TO252-3-MFG 100.244,96.9 r270 top (schematic designator Q6)
Q6_tube4 "IRFR220NTRPBF" FP-PG-TO252-3-MFG 75.544,96.9 r270 top (schematic designator Q6)
Q6_tube5 "IRFR220NTRPBF" FP-PG-TO252-3-MFG 44.644,96.9 r270 top (schematic designator Q6)
Q6_tube6 "IRFR220NTRPBF" FP-PG-TO252-3-MFG 19.944,96.9 r270 top (schematic designator Q6)
Q7_tube1 "IRFR220NTRPBF" FP-PG-TO252-3-MFG 143.642,96.9 r270 top (schematic designator Q7)
Q7_tube2 "IRFR220NTRPBF" FP-PG-TO252-3-MFG 118.942,96.9 r270 top (schematic designator Q7)
Q7_tube3 "IRFR220NTRPBF" FP-PG-TO252-3-MFG 88.042,96.9 r270 top (schematic designator Q7)
Q7_tube4 "IRFR220NTRPBF" FP-PG-TO252-3-MFG 63.342,96.9 r270 top (schematic designator Q7)
Q7_tube5 "IRFR220NTRPBF" FP-PG-TO252-3-MFG 32.442,96.9 r270 top (schematic designator Q7)
Q7_tube6 "IRFR220NTRPBF" FP-PG-TO252-3-MFG 7.742,96.9 r270 top (schematic designator Q7)
Q8_tube1 "IRFR220NTRPBF" FP-PG-TO252-3-MFG 155.844,89.3 r270 top (schematic designator Q8)
Q8_tube2 "IRFR220NTRPBF" FP-PG-TO252-3-MFG 131.144,89.3 r270 top (schematic designator Q8)
Q8_tube3 "IRFR220NTRPBF" FP-PG-TO252-3-MFG 100.244,89.3 r270 top (schematic designator Q8)
Q8_tube4 "IRFR220NTRPBF" FP-PG-TO252-3-MFG 75.544,89.3 r270 top (schematic designator Q8)
Q8_tube5 "IRFR220NTRPBF" FP-PG-TO252-3-MFG 44.644,89.3 r270 top (schematic designator Q8)
Q8_tube6 "IRFR220NTRPBF" FP-PG-TO252-3-MFG 19.944,89.3 r270 top (schematic designator Q8)
Q9_tube1 "IRFR220NTRPBF" FP-PG-TO252-3-MFG 143.633,89.3 r270 top (schematic designator Q9)
Q9_tube2 "IRFR220NTRPBF" FP-PG-TO252-3-MFG 118.933,89.3 r270 top (schematic designator Q9)
Q9_tube3 "IRFR220NTRPBF" FP-PG-TO252-3-MFG 88.033,89.3 r270 top (schematic designator Q9)
Q9_tube4 "IRFR220NTRPBF" FP-PG-TO252-3-MFG 63.333,89.3 r270 top (schematic designator Q9)
Q9_tube5 "IRFR220NTRPBF" FP-PG-TO252-3-MFG 32.433,89.3 r270 top (schematic designator Q9)
Q9_tube6 "IRFR220NTRPBF" FP-PG-TO252-3-MFG 7.733,89.3 r270 top (schematic designator Q9)
Q10_tube1 "IRFR220NTRPBF" FP-PG-TO252-3-MFG 155.844,81.7 r270 top (schematic designator Q10)
Q10_tube2 "IRFR220NTRPBF" FP-PG-TO252-3-MFG 131.144,81.7 r270 top (schematic designator Q10)
Q10_tube3 "IRFR220NTRPBF" FP-PG-TO252-3-MFG 100.244,81.7 r270 top (schematic designator Q10)
Q10_tube4 "IRFR220NTRPBF" FP-PG-TO252-3-MFG 75.544,81.7 r270 top (schematic designator Q10)
Q10_tube5 "IRFR220NTRPBF" FP-PG-TO252-3-MFG 44.644,81.7 r270 top (schematic designator Q10)
Q10_tube6 "IRFR220NTRPBF" FP-PG-TO252-3-MFG 19.944,81.7 r270 top (schematic designator Q10)
Q11_tube1 "IRFR220NTRPBF" FP-PG-TO252-3-MFG 143.585,81.7 r270 top (schematic designator Q11)
Q11_tube2 "IRFR220NTRPBF" FP-PG-TO252-3-MFG 118.885,81.7 r270 top (schematic designator Q11)
Q11_tube3 "IRFR220NTRPBF" FP-PG-TO252-3-MFG 87.985,81.7 r270 top (schematic designator Q11)
Q11_tube4 "IRFR220NTRPBF" FP-PG-TO252-3-MFG 63.285,81.7 r270 top (schematic designator Q11)
Q11_tube5 "IRFR220NTRPBF" FP-PG-TO252-3-MFG 32.385,81.7 r270 top (schematic designator Q11)
Q11_tube6 "IRFR220NTRPBF" FP-PG-TO252-3-MFG 7.685,81.7 r270 top (schematic designator Q11)
Q12_tube1 "IRFR220NTRPBF" FP-PG-TO252-3-MFG 152.9,113.7 r180 top (schematic designator Q12)
Q12_tube2 "IRFR220NTRPBF" FP-PG-TO252-3-MFG 128.2,113.7 r180 top (schematic designator Q12)
Q12_tube3 "IRFR220NTRPBF" FP-PG-TO252-3-MFG 97.3,113.7 r180 top (schematic designator Q12)
Q12_tube4 "IRFR220NTRPBF" FP-PG-TO252-3-MFG 72.6,113.7 r180 top (schematic designator Q12)
Q12_tube5 "IRFR220NTRPBF" FP-PG-TO252-3-MFG 41.7,113.7 r180 top (schematic designator Q12)
Q12_tube6 "IRFR220NTRPBF" FP-PG-TO252-3-MFG 17,113.7 r180 top (schematic designator Q12)
Q13_tube1 "IRF9640STRLPbF" IRF9640STRLPbF 143.4,113.3 r270 top (schematic designator Q13)
Q13_tube2 "IRF9640STRLPbF" IRF9640STRLPbF 118.7,113.3 r270 top (schematic designator Q13)
Q13_tube3 "IRF9640STRLPbF" IRF9640STRLPbF 87.8,113.3 r270 top (schematic designator Q13)
Q13_tube4 "IRF9640STRLPbF" IRF9640STRLPbF 63.1,113.3 r270 top (schematic designator Q13)
Q13_tube5 "IRF9640STRLPbF" IRF9640STRLPbF 32.2,113.3 r270 top (schematic designator Q13)
Q13_tube6 "IRF9640STRLPbF" IRF9640STRLPbF 7.5,113.3 r270 top (schematic designator Q13)
R1 "0402WGF5102TCE" 0402WGF5102TCE 3.65,68.8 r270 top value=51kO
R2 "0402WGF1004TCE" 0402WGF1004TCE 5.4,51.6 r0 top value=1MO
R3 "0402WGF5102TCE" 0402WGF5102TCE 4.2,52.6 r270 top value=51kO
R4 "0603WAF2203T5E" 0603WAF2203T5E 2.4,59.325 r270 top value=220kO
R5 "0402WGF220JTCE" 0402WGF220JTCE 6.4,59.1 r270 top value=22O
R6 "0402WGF1003TCE" 0402WGF1003TCE 3.8,60.225 r180 top value=100kO
R7 "0402WGF1002TCE" 0402WGF1002TCE 3.3,52.2 r90 top value=10kO
R8 "PE0402FRF070R02L" "RES 0402_1005" 7.1,57.1 r90 top value="20 mOhms"
R9 "0402WGF1003TCE" 0402WGF1003TCE 6.5,54.1 r270 top value=100kO
R10 "0402WGF6801TCE" 0402WGF6801TCE 2.97,54.05 r270 top value=6.8kO
R11_tube1 "0402WGF1004TCE" 0402WGF1004TCE 150.944,131.3 r0 top value=1MO (schematic designator R11)
R11_tube2 "0402WGF1004TCE" 0402WGF1004TCE 126.244,131.3 r0 top value=1MO (schematic designator R11)
R11_tube3 "0402WGF1004TCE" 0402WGF1004TCE 95.344,131.3 r0 top value=1MO (schematic designator R11)
R11_tube4 "0402WGF1004TCE" 0402WGF1004TCE 70.644,131.3 r0 top value=1MO (schematic designator R11)
R11_tube5 "0402WGF1004TCE" 0402WGF1004TCE 39.744,131.3 r0 top value=1MO (schematic designator R11)
R11_tube6 "0402WGF1004TCE" 0402WGF1004TCE 15.044,131.3 r0 top value=1MO (schematic designator R11)
R12_tube1 "0402WGF1001TCE" 0402WGF1001TCE 150.944,132.7 r0 top value=1kO (schematic designator R12)
R12_tube2 "0402WGF1001TCE" 0402WGF1001TCE 126.244,132.7 r0 top value=1kO (schematic designator R12)
R12_tube3 "0402WGF1001TCE" 0402WGF1001TCE 95.344,132.7 r0 top value=1kO (schematic designator R12)
R12_tube4 "0402WGF1001TCE" 0402WGF1001TCE 70.644,132.7 r0 top value=1kO (schematic designator R12)
R12_tube5 "0402WGF1001TCE" 0402WGF1001TCE 39.744,132.7 r0 top value=1kO (schematic designator R12)
R12_tube6 "0402WGF1001TCE" 0402WGF1001TCE 15.044,132.7 r0 top value=1kO (schematic designator R12)
R13_tube1 "0402WGF1004TCE" 0402WGF1004TCE 151,123.7 r0 top value=1MO (schematic designator R13)
R13_tube2 "0402WGF1004TCE" 0402WGF1004TCE 126.3,123.7 r0 top value=1MO (schematic designator R13)
R13_tube3 "0402WGF1004TCE" 0402WGF1004TCE 95.4,123.7 r0 top value=1MO (schematic designator R13)
R13_tube4 "0402WGF1004TCE" 0402WGF1004TCE 70.7,123.7 r0 top value=1MO (schematic designator R13)
R13_tube5 "0402WGF1004TCE" 0402WGF1004TCE 39.8,123.7 r0 top value=1MO (schematic designator R13)
R13_tube6 "0402WGF1004TCE" 0402WGF1004TCE 15.1,123.7 r0 top value=1MO (schematic designator R13)
R14_tube1 "0402WGF1001TCE" 0402WGF1001TCE 151,125.1 r0 top value=1kO (schematic designator R14)
R14_tube2 "0402WGF1001TCE" 0402WGF1001TCE 126.3,125.1 r0 top value=1kO (schematic designator R14)
R14_tube3 "0402WGF1001TCE" 0402WGF1001TCE 95.4,125.1 r0 top value=1kO (schematic designator R14)
R14_tube4 "0402WGF1001TCE" 0402WGF1001TCE 70.7,125.1 r0 top value=1kO (schematic designator R14)
R14_tube5 "0402WGF1001TCE" 0402WGF1001TCE 39.8,125.1 r0 top value=1kO (schematic designator R14)
R14_tube6 "0402WGF1001TCE" 0402WGF1001TCE 15.1,125.1 r0 top value=1kO (schematic designator R14)
R15_tube1 "0402WGF1004TCE" 0402WGF1004TCE 139.125,131.2 r0 top value=1MO (schematic designator R15)
R15_tube2 "0402WGF1004TCE" 0402WGF1004TCE 114.425,131.2 r0 top value=1MO (schematic designator R15)
R15_tube3 "0402WGF1004TCE" 0402WGF1004TCE 83.525,131.2 r0 top value=1MO (schematic designator R15)
R15_tube4 "0402WGF1004TCE" 0402WGF1004TCE 58.825,131.2 r0 top value=1MO (schematic designator R15)
R15_tube5 "0402WGF1004TCE" 0402WGF1004TCE 27.925,131.2 r0 top value=1MO (schematic designator R15)
R15_tube6 "0402WGF1004TCE" 0402WGF1004TCE 3.225,131.2 r0 top value=1MO (schematic designator R15)
R16_tube1 "0402WGF1001TCE" 0402WGF1001TCE 139.125,132.6 r0 top value=1kO (schematic designator R16)
R16_tube2 "0402WGF1001TCE" 0402WGF1001TCE 114.425,132.6 r0 top value=1kO (schematic designator R16)
R16_tube3 "0402WGF1001TCE" 0402WGF1001TCE 83.525,132.6 r0 top value=1kO (schematic designator R16)
R16_tube4 "0402WGF1001TCE" 0402WGF1001TCE 58.825,132.6 r0 top value=1kO (schematic designator R16)
R16_tube5 "0402WGF1001TCE" 0402WGF1001TCE 27.925,132.6 r0 top value=1kO (schematic designator R16)
R16_tube6 "0402WGF1001TCE" 0402WGF1001TCE 3.225,132.6 r0 top value=1kO (schematic designator R16)
R17_tube1 "0402WGF1004TCE" 0402WGF1004TCE 138.925,123.7 r0 top value=1MO (schematic designator R17)
R17_tube2 "0402WGF1004TCE" 0402WGF1004TCE 114.225,123.7 r0 top value=1MO (schematic designator R17)
R17_tube3 "0402WGF1004TCE" 0402WGF1004TCE 83.325,123.7 r0 top value=1MO (schematic designator R17)
R17_tube4 "0402WGF1004TCE" 0402WGF1004TCE 58.625,123.7 r0 top value=1MO (schematic designator R17)
R17_tube5 "0402WGF1004TCE" 0402WGF1004TCE 27.725,123.7 r0 top value=1MO (schematic designator R17)
R17_tube6 "0402WGF1004TCE" 0402WGF1004TCE 3.025,123.7 r0 top value=1MO (schematic designator R17)
R18_tube1 "0402WGF1001TCE" 0402WGF1001TCE 138.925,125.1 r0 top value=1kO (schematic designator R18)
R18_tube2 "0402WGF1001TCE" 0402WGF1001TCE 114.225,125.1 r0 top value=1kO (schematic designator R18)
R18_tube3 "0402WGF1001TCE" 0402WGF1001TCE 83.325,125.1 r0 top value=1kO (schematic designator R18)
R18_tube4 "0402WGF1001TCE" 0402WGF1001TCE 58.625,125.1 r0 top value=1kO (schematic designator R18)
R18_tube5 "0402WGF1001TCE" 0402WGF1001TCE 27.725,125.1 r0 top value=1kO (schematic designator R18)
R18_tube6 "0402WGF1001TCE" 0402WGF1001TCE 3.025,125.1 r0 top value=1kO (schematic designator R18)
R19_tube1 "0402WGF1004TCE" 0402WGF1004TCE 150.933,96.2 r0 top value=1MO (schematic designator R19)
R19_tube2 "0402WGF1004TCE" 0402WGF1004TCE 126.233,96.2 r0 top value=1MO (schematic designator R19)
R19_tube3 "0402WGF1004TCE" 0402WGF1004TCE 95.333,96.2 r0 top value=1MO (schematic designator R19)
R19_tube4 "0402WGF1004TCE" 0402WGF1004TCE 70.633,96.2 r0 top value=1MO (schematic designator R19)
R19_tube5 "0402WGF1004TCE" 0402WGF1004TCE 39.733,96.2 r0 top value=1MO (schematic designator R19)
R19_tube6 "0402WGF1004TCE" 0402WGF1004TCE 15.033,96.2 r0 top value=1MO (schematic designator R19)
R20_tube1 "0402WGF1001TCE" 0402WGF1001TCE 150.933,97.6 r0 top value=1kO (schematic designator R20)
R20_tube2 "0402WGF1001TCE" 0402WGF1001TCE 126.233,97.6 r0 top value=1kO (schematic designator R20)
R20_tube3 "0402WGF1001TCE" 0402WGF1001TCE 95.333,97.6 r0 top value=1kO (schematic designator R20)
R20_tube4 "0402WGF1001TCE" 0402WGF1001TCE 70.633,97.6 r0 top value=1kO (schematic designator R20)
R20_tube5 "0402WGF1001TCE" 0402WGF1001TCE 39.733,97.6 r0 top value=1kO (schematic designator R20)
R20_tube6 "0402WGF1001TCE" 0402WGF1001TCE 15.033,97.6 r0 top value=1kO (schematic designator R20)
R21_tube1 "0402WGF1004TCE" 0402WGF1004TCE 138.767,96.2 r0 top value=1MO (schematic designator R21)
R21_tube2 "0402WGF1004TCE" 0402WGF1004TCE 114.067,96.2 r0 top value=1MO (schematic designator R21)
R21_tube3 "0402WGF1004TCE" 0402WGF1004TCE 83.167,96.2 r0 top value=1MO (schematic designator R21)
R21_tube4 "0402WGF1004TCE" 0402WGF1004TCE 58.467,96.2 r0 top value=1MO (schematic designator R21)
R21_tube5 "0402WGF1004TCE" 0402WGF1004TCE 27.567,96.2 r0 top value=1MO (schematic designator R21)
R21_tube6 "0402WGF1004TCE" 0402WGF1004TCE 2.867,96.2 r0 top value=1MO (schematic designator R21)
R22_tube1 "0402WGF1001TCE" 0402WGF1001TCE 138.767,97.6 r0 top value=1kO (schematic designator R22)
R22_tube2 "0402WGF1001TCE" 0402WGF1001TCE 114.067,97.6 r0 top value=1kO (schematic designator R22)
R22_tube3 "0402WGF1001TCE" 0402WGF1001TCE 83.167,97.6 r0 top value=1kO (schematic designator R22)
R22_tube4 "0402WGF1001TCE" 0402WGF1001TCE 58.467,97.6 r0 top value=1kO (schematic designator R22)
R22_tube5 "0402WGF1001TCE" 0402WGF1001TCE 27.567,97.6 r0 top value=1kO (schematic designator R22)
R22_tube6 "0402WGF1001TCE" 0402WGF1001TCE 2.867,97.6 r0 top value=1kO (schematic designator R22)
R23_tube1 "0402WGF1004TCE" 0402WGF1004TCE 150.9,88.5 r0 top value=1MO (schematic designator R23)
R23_tube2 "0402WGF1004TCE" 0402WGF1004TCE 126.2,88.5 r0 top value=1MO (schematic designator R23)
R23_tube3 "0402WGF1004TCE" 0402WGF1004TCE 95.3,88.5 r0 top value=1MO (schematic designator R23)
R23_tube4 "0402WGF1004TCE" 0402WGF1004TCE 70.6,88.5 r0 top value=1MO (schematic designator R23)
R23_tube5 "0402WGF1004TCE" 0402WGF1004TCE 39.7,88.5 r0 top value=1MO (schematic designator R23)
R23_tube6 "0402WGF1004TCE" 0402WGF1004TCE 15,88.5 r0 top value=1MO (schematic designator R23)
R24_tube1 "0402WGF1001TCE" 0402WGF1001TCE 150.9,89.9 r0 top value=1kO (schematic designator R24)
R24_tube2 "0402WGF1001TCE" 0402WGF1001TCE 126.2,89.9 r0 top value=1kO (schematic designator R24)
R24_tube3 "0402WGF1001TCE" 0402WGF1001TCE 95.3,89.9 r0 top value=1kO (schematic designator R24)
R24_tube4 "0402WGF1001TCE" 0402WGF1001TCE 70.6,89.9 r0 top value=1kO (schematic designator R24)
R24_tube5 "0402WGF1001TCE" 0402WGF1001TCE 39.7,89.9 r0 top value=1kO (schematic designator R24)
R24_tube6 "0402WGF1001TCE" 0402WGF1001TCE 15,89.9 r0 top value=1kO (schematic designator R24)
R25_tube1 "0402WGF1004TCE" 0402WGF1004TCE 138.8,88.6 r0 top value=1MO (schematic designator R25)
R25_tube2 "0402WGF1004TCE" 0402WGF1004TCE 114.1,88.6 r0 top value=1MO (schematic designator R25)
R25_tube3 "0402WGF1004TCE" 0402WGF1004TCE 83.2,88.6 r0 top value=1MO (schematic designator R25)
R25_tube4 "0402WGF1004TCE" 0402WGF1004TCE 58.5,88.6 r0 top value=1MO (schematic designator R25)
R25_tube5 "0402WGF1004TCE" 0402WGF1004TCE 27.6,88.6 r0 top value=1MO (schematic designator R25)
R25_tube6 "0402WGF1004TCE" 0402WGF1004TCE 2.9,88.6 r0 top value=1MO (schematic designator R25)
R26_tube1 "0402WGF1001TCE" 0402WGF1001TCE 138.8,90 r0 top value=1kO (schematic designator R26)
R26_tube2 "0402WGF1001TCE" 0402WGF1001TCE 114.1,90 r0 top value=1kO (schematic designator R26)
R26_tube3 "0402WGF1001TCE" 0402WGF1001TCE 83.2,90 r0 top value=1kO (schematic designator R26)
R26_tube4 "0402WGF1001TCE" 0402WGF1001TCE 58.5,90 r0 top value=1kO (schematic designator R26)
R26_tube5 "0402WGF1001TCE" 0402WGF1001TCE 27.6,90 r0 top value=1kO (schematic designator R26)
R26_tube6 "0402WGF1001TCE" 0402WGF1001TCE 2.9,90 r0 top value=1kO (schematic designator R26)
R27_tube1 "0402WGF1004TCE" 0402WGF1004TCE 150.933,81 r0 top value=1MO (schematic designator R27)
R27_tube2 "0402WGF1004TCE" 0402WGF1004TCE 126.233,81 r0 top value=1MO (schematic designator R27)
R27_tube3 "0402WGF1004TCE" 0402WGF1004TCE 95.333,81 r0 top value=1MO (schematic designator R27)
R27_tube4 "0402WGF1004TCE" 0402WGF1004TCE 70.633,81 r0 top value=1MO (schematic designator R27)
R27_tube5 "0402WGF1004TCE" 0402WGF1004TCE 39.733,81 r0 top value=1MO (schematic designator R27)
R27_tube6 "0402WGF1004TCE" 0402WGF1004TCE 15.033,81 r0 top value=1MO (schematic designator R27)
R28_tube1 "0402WGF1001TCE" 0402WGF1001TCE 150.933,82.4 r0 top value=1kO (schematic designator R28)
R28_tube2 "0402WGF1001TCE" 0402WGF1001TCE 126.233,82.4 r0 top value=1kO (schematic designator R28)
R28_tube3 "0402WGF1001TCE" 0402WGF1001TCE 95.333,82.4 r0 top value=1kO (schematic designator R28)
R28_tube4 "0402WGF1001TCE" 0402WGF1001TCE 70.633,82.4 r0 top value=1kO (schematic designator R28)
R28_tube5 "0402WGF1001TCE" 0402WGF1001TCE 39.733,82.4 r0 top value=1kO (schematic designator R28)
R28_tube6 "0402WGF1001TCE" 0402WGF1001TCE 15.033,82.4 r0 top value=1kO (schematic designator R28)
R29_tube1 "0402WGF1004TCE" 0402WGF1004TCE 138.733,81 r0 top value=1MO (schematic designator R29)
R29_tube2 "0402WGF1004TCE" 0402WGF1004TCE 114.033,81 r0 top value=1MO (schematic designator R29)
R29_tube3 "0402WGF1004TCE" 0402WGF1004TCE 83.133,81 r0 top value=1MO (schematic designator R29)
R29_tube4 "0402WGF1004TCE" 0402WGF1004TCE 58.433,81 r0 top value=1MO (schematic designator R29)
R29_tube5 "0402WGF1004TCE" 0402WGF1004TCE 27.533,81 r0 top value=1MO (schematic designator R29)
R29_tube6 "0402WGF1004TCE" 0402WGF1004TCE 2.833,81 r0 top value=1MO (schematic designator R29)
R30_tube1 "0402WGF1001TCE" 0402WGF1001TCE 153.643,118.645 r90 top value=1kO (schematic designator R30)
R30_tube2 "0402WGF1001TCE" 0402WGF1001TCE 128.943,118.645 r90 top value=1kO (schematic designator R30)
R30_tube3 "0402WGF1001TCE" 0402WGF1001TCE 98.043,118.645 r90 top value=1kO (schematic designator R30)
R30_tube4 "0402WGF1001TCE" 0402WGF1001TCE 73.343,118.645 r90 top value=1kO (schematic designator R30)
R30_tube5 "0402WGF1001TCE" 0402WGF1001TCE 42.443,118.645 r90 top value=1kO (schematic designator R30)
R30_tube6 "0402WGF1001TCE" 0402WGF1001TCE 17.743,118.645 r90 top value=1kO (schematic designator R30)
R31_tube1 "0402WGF1001TCE" 0402WGF1001TCE 138.733,82.4 r0 top value=1kO (schematic designator R31)
R31_tube2 "0402WGF1001TCE" 0402WGF1001TCE 114.033,82.4 r0 top value=1kO (schematic designator R31)
R31_tube3 "0402WGF1001TCE" 0402WGF1001TCE 83.133,82.4 r0 top value=1kO (schematic designator R31)
R31_tube4 "0402WGF1001TCE" 0402WGF1001TCE 58.433,82.4 r0 top value=1kO (schematic designator R31)
R31_tube5 "0402WGF1001TCE" 0402WGF1001TCE 27.533,82.4 r0 top value=1kO (schematic designator R31)
R31_tube6 "0402WGF1001TCE" 0402WGF1001TCE 2.833,82.4 r0 top value=1kO (schematic designator R31)
R32_tube1 "0402WGF1004TCE" 0402WGF1004TCE 152.243,118.645 r90 top value=1MO (schematic designator R32)
R32_tube2 "0402WGF1004TCE" 0402WGF1004TCE 127.543,118.645 r90 top value=1MO (schematic designator R32)
R32_tube3 "0402WGF1004TCE" 0402WGF1004TCE 96.643,118.645 r90 top value=1MO (schematic designator R32)
R32_tube4 "0402WGF1004TCE" 0402WGF1004TCE 71.943,118.645 r90 top value=1MO (schematic designator R32)
R32_tube5 "0402WGF1004TCE" 0402WGF1004TCE 41.043,118.645 r90 top value=1MO (schematic designator R32)
R32_tube6 "0402WGF1004TCE" 0402WGF1004TCE 16.343,118.645 r90 top value=1MO (schematic designator R32)
R33_tube1 "0603WAF3303T5E" 0603WAF3303T5E 142.5,118.7 r90 top value=330kO (schematic designator R33)
R33_tube2 "0603WAF3303T5E" 0603WAF3303T5E 117.8,118.7 r90 top value=330kO (schematic designator R33)
R33_tube3 "0603WAF3303T5E" 0603WAF3303T5E 86.9,118.7 r90 top value=330kO (schematic designator R33)
R33_tube4 "0603WAF3303T5E" 0603WAF3303T5E 62.2,118.7 r90 top value=330kO (schematic designator R33)
R33_tube5 "0603WAF3303T5E" 0603WAF3303T5E 31.3,118.7 r90 top value=330kO (schematic designator R33)
R33_tube6 "0603WAF3303T5E" 0603WAF3303T5E 6.6,118.7 r90 top value=330kO (schematic designator R33)
R34_tube1 "0603WAF1005T5E" 0603WAF1005T5E 144.3,118.7 r270 top value=10MO (schematic designator R34)
R34_tube2 "0603WAF1005T5E" 0603WAF1005T5E 119.6,118.7 r270 top value=10MO (schematic designator R34)
R34_tube3 "0603WAF1005T5E" 0603WAF1005T5E 88.7,118.7 r270 top value=10MO (schematic designator R34)
R34_tube4 "0603WAF1005T5E" 0603WAF1005T5E 64,118.7 r270 top value=10MO (schematic designator R34)
R34_tube5 "0603WAF1005T5E" 0603WAF1005T5E 33.1,118.7 r270 top value=10MO (schematic designator R34)
R34_tube6 "0603WAF1005T5E" 0603WAF1005T5E 8.4,118.7 r270 top value=10MO (schematic designator R34)
R35_tube1 "0603WAF2402T5E" 0603WAF2402T5E 141.1,102.7 r0 top value=24kO (schematic designator R35)
R35_tube2 "0603WAF2402T5E" 0603WAF2402T5E 116.4,102.7 r0 top value=24kO (schematic designator R35)
R35_tube3 "0603WAF2402T5E" 0603WAF2402T5E 85.5,102.7 r0 top value=24kO (schematic designator R35)
R35_tube4 "0603WAF2402T5E" 0603WAF2402T5E 60.8,102.7 r0 top value=24kO (schematic designator R35)
R35_tube5 "0603WAF2402T5E" 0603WAF2402T5E 29.9,102.7 r0 top value=24kO (schematic designator R35)
R35_tube6 "0603WAF2402T5E" 0603WAF2402T5E 5.2,102.7 r0 top value=24kO (schematic designator R35)
R36 "0402WGF1201TCE" 0402WGF1201TCE 15.014,29.53 r90 top value=1.2kO
R37 "0402WGF1003TCE" 0402WGF1003TCE 28.1,12.9 r90 top value=100kO
R38 "0402WGF1003TCE" 0402WGF1003TCE 19.848,18.123 r0 top value=100kO
R39 "0402WGF4701TCE" 0402WGF4701TCE 123,29.7 r90 top value=4.7kO
R40 "0402WGF4701TCE" 0402WGF4701TCE 123,31.733 r270 top value=4.7kO
R41 "0402WGF4701TCE" 0402WGF4701TCE 13.255,46.128 r90 top value=4.7kO
R42 "0402WGF1004TCE" 0402WGF1004TCE 13.255,48.328 r270 top value=1MO
R43 "0603WAF2204T5E" 0603WAF2204T5E 15.555,48.628 r180 top value=2.2MO
R44 "0402WGF1004TCE" 0402WGF1004TCE 18.167,48.8 r180 top value=1MO
SW1 "TS-1187A-B-A-B" TS-1187A-B-A-B 34.565,11.81 r180 top
SW2 "SS12D07VG4 087" "SS12D07VG4 087" 110.9,16.5 r90 top
SW3 "TS-1187A-B-A-B" TS-1187A-B-A-B 42.523,6.15 r0 top
SW4 "TS-1187A-B-A-B" TS-1187A-B-A-B 57.848,6.15 r0 top
SW5 "TS-1187A-B-A-B" TS-1187A-B-A-B 73.174,6.15 r0 top
SW6 "TS-1187A-B-A-B" TS-1187A-B-A-B 88.5,6.15 r0 top
SW7 "TS-1187A-B-A-B" TS-1187A-B-A-B 103.826,6.15 r0 top
U1 "DA2032-ALD" DA2032-ALD 20.9,64.8 r270 top
U2 "LT3757AEMSE#PBF" LT-MSE-10-EDP_N 4.7,56.425 r90 top
U3 "2.54-1_4" 2.54-1_4 2.6,29.43 r270 top
U4 "SN74LVCC3245APWR" FP-PW0024A-MFG 44.135,66.081 r90 top
U5 "SN74LVCC3245APWR" FP-PW0024A-MFG 52.735,66.081 r90 top
U6 "SN74HC164PWR" FP-PW0014A-MFG 100.4,66.1 r270 top
U7 "SN74HC164PWR" FP-PW0014A-MFG 94.65,66.1 r270 top
U8 "SN74HC164PWR" FP-PW0014A-MFG 88.85,66.1 r270 top
U9 "SN74HC164PWR" FP-PW0014A-MFG 83.05,66.1 r270 top
U10 "SN74HC164PWR" FP-PW0014A-MFG 77.25,66.1 r270 top
U11 "SN74HC164PWR" FP-PW0014A-MFG 71.5,66.1 r270 top
U12 "SN74HC164PWR" FP-PW0014A-MFG 65.7,66.1 r270 top
U13 "SN74HC164PWR" FP-PW0014A-MFG 59.95,66.1 r270 top
U14 "STM32L433VCT6" STM32L433VCT6 24.399,30.76 r270 top
U15 "NRF7002-QFAA-R7" IC_NRF7002-QFAA-R7 20.248,13.723 r0 top
U16 "TCK106AG,LF" TCK106AG,LF 17.848,17.823 r180 top
U17 "TPS2117DRLR" TPS2117DRLR 15.1,46.3 r90 top
U18 "MCP1702T-3302E/CB" SOT-23A-CB3_N 18.5,46.2 r180 top
U19_tube1 "HMT-2.54-1_5PM" HMT-2.54-1_5PM 149.63,102.304 r180 top (schematic designator U19)
U19_tube2 "HMT-2.54-1_5PM" HMT-2.54-1_5PM 125.003,102.304 r180 top (schematic designator U19)
U19_tube3 "HMT-2.54-1_5PM" HMT-2.54-1_5PM 94.103,102.304 r180 top (schematic designator U19)
U19_tube4 "HMT-2.54-1_5PM" HMT-2.54-1_5PM 69.403,102.304 r180 top (schematic designator U19)
U19_tube5 "HMT-2.54-1_5PM" HMT-2.54-1_5PM 38.503,102.304 r180 top (schematic designator U19)
U19_tube6 "HMT-2.54-1_5PM" HMT-2.54-1_5PM 13.803,102.304 r180 top (schematic designator U19)
U20 "BH-AAA-A1AJ024" BH-AAA-A1AJ024 111.3,64.5 r180 top
USB1 "MicroXNJ" MicroXNJ 3.157,45.758 r180 top
X1 "TZ0308D" TZ0308D 20.148,6.423 r0 top value=40MHz
X2 "Q13FC13500004" Q13FC13500004 12.614,37.265 r0 top value=32.768kHz
X3 "X49SM4MSD2SC" X49SM4MSD2SC 11.19,28.465 r90 top value=4MHz

## Footprints (in the part's own frame and the unit in brackets; to place one, negate y for a bottom-side part, rotate by r counter-clockwise, add the part's x,y. Pads: shape width x height; smd on the part's side, far side on the other; paste and mask are expansions set on the pad)
2.54-1_4 [mm] "Pin Headers. -40C~+105C 1 1x4P 2.54mm 2.54mm 2.5A 3mm 4P 6mm Brass Gold Pin Header Through Hole ,P=2.54mm Pin Headers ROHS"
  rect 1.7x1.7 hole 1.1: 1(-3.81,0)
  round 1.7 hole 1.1: 2(-1.27,0) 3(1.27,0) 4(3.81,0)
  silkscreen extent -5.08,-1.27 5.08,1.27, body extent -5.08,-1.27 5.08,1.27
2.54-1_6P [mm] "Pin Headers. -40C~+105C 1 1x6P 2.54mm 3.3mm 3A 6P Brass Square Hole Through Hole Top ,P=2.54mm Female Headers ROHS"
  rect 1.8x1.8 hole 1.02: 1(-6.35,0)
  round 1.6 hole 1.02: 2(-3.81,0) 3(-1.27,0) 4(1.27,0) 5(3.81,0) 6(6.35,0)
  silkscreen extent -7.62,-1.27 7.62,1.27, body extent -7.87,-1.2 7.87,1.2
0402B223K500NT [mm] "Multilayer Ceramic Capacitors MLCC - SMD/SMT. 22nF 50V X7R +/-10% 0402 Multilayer Ceramic Capacitors MLCC - SMD/SMT ROHS"
  rect 0.5x0.54 smd: 1(-0.42,0) 2(0.42,0)
  silkscreen extent -0.72,-0.5 0.72,0.5, body extent -0.5,-0.25 0.5,0.25
0402CG101J500NT [mm] "Multilayer Ceramic Capacitors MLCC - SMD/SMT. 100pF 50V C0G +/-5% 0402 Multilayer Ceramic Capacitors MLCC - SMD/SMT ROHS"
  rect 0.5x0.54 smd: 1(-0.42,0) 2(0.42,0)
  silkscreen extent -0.72,-0.5 0.72,0.5, body extent -0.5,-0.25 0.5,0.25
0402CG220J500NT [mm] "Multilayer Ceramic Capacitors MLCC - SMD/SMT. 22pF 50V C0G +/-5% 0402 Multilayer Ceramic Capacitors MLCC - SMD/SMT ROHS"
  rect 0.5x0.54 smd: 1(-0.42,0) 2(0.42,0)
  silkscreen extent -0.72,-0.5 0.72,0.5, body extent -0.5,-0.25 0.5,0.25
0402CG330J500NT [mm] "Multilayer Ceramic Capacitors MLCC - SMD/SMT. 33pF 50V C0G +/-5% 0402 Multilayer Ceramic Capacitors MLCC - SMD/SMT ROHS"
  rect 0.5x0.54 smd: 1(-0.42,0) 2(0.42,0)
  silkscreen extent 0.22,-0.5 0.72,-0.5, body extent -0.5,-0.25 0.5,0.25
0402WGF220JTCE [mm] "Resistors. -55C~+155C 22ohm 50V 62.5mW Thick Film Resistor +/-1% +/-100ppm/C 0402 Chip Resistor - Surface Mount ROHS"
  rect 0.566x0.54 smd: 1(-0.433,0) 2(0.433,0)
  silkscreen extent -0.94,-0.5 0.94,0.5, body extent -0.5,-0.25 0.5,0.25
0402WGF1001TCE [mm] "Resistors. -55C~+155C 1kohm 50V 62.5mW Thick Film Resistor +/-1% +/-100ppm/C 0402 Chip Resistor - Surface Mount ROHS"
  rect 0.566x0.54 smd: 1(-0.433,0) 2(0.433,0)
  silkscreen extent -0.94,-0.5 0.94,0.5, body extent -0.5,-0.25 0.5,0.25
0402WGF1002TCE [mm] "Resistors. -55C~+155C 10kohm 50V 62.5mW Thick Film Resistor +/-1% +/-100ppm/C 0402 Chip Resistor - Surface Mount ROHS"
  rect 0.566x0.54 smd: 1(-0.433,0) 2(0.433,0)
  silkscreen extent -0.94,-0.5 0.94,0.5, body extent -0.5,-0.25 0.5,0.25
0402WGF1003TCE [mm] "Resistors. -55C~+155C 100kohm 50V 62.5mW Thick Film Resistor +/-1% +/-100ppm/C 0402 Chip Resistor - Surface Mount ROHS"
  rect 0.566x0.54 smd: 1(-0.433,0) 2(0.433,0)
  silkscreen extent -0.94,-0.5 0.94,0.5, body extent -0.5,-0.25 0.5,0.25
0402WGF1004TCE [mm] "Resistors. -55C~+155C 1Mohm 50V 62.5mW Thick Film Resistor +/-1% +/-100ppm/C 0402 Chip Resistor - Surface Mount ROHS"
  rect 0.566x0.54 smd: 1(-0.433,0) 2(0.433,0)
  silkscreen extent -0.94,-0.5 0.94,0.5, body extent -0.5,-0.25 0.5,0.25
0402WGF1201TCE [mm] "Resistors. -55C~+155C 1.2kohm 50V 62.5mW Thick Film Resistor +/-1% +/-100ppm/C 0402 Chip Resistor - Surface Mount ROHS"
  rect 0.566x0.54 smd: 1(-0.433,0) 2(0.433,0)
  silkscreen extent -0.94,-0.5 0.94,0.5, body extent -0.5,-0.25 0.5,0.25
0402WGF4701TCE [mm] "Resistors. -55C~+155C 4.7kohm 50V 62.5mW Thick Film Resistor +/-1% +/-100ppm/C 0402 Chip Resistor - Surface Mount ROHS"
  rect 0.566x0.54 smd: 1(-0.433,0) 2(0.433,0)
  silkscreen extent -0.94,-0.5 0.94,0.5, body extent -0.5,-0.25 0.5,0.25
0402WGF5102TCE [mm] "Resistors. -55C~+155C 50V 51kohm 62.5mW Thick Film Resistor +/-1% +/-100ppm/C 0402 Chip Resistor - Surface Mount ROHS"
  rect 0.566x0.54 smd: 1(-0.433,0) 2(0.433,0)
  silkscreen extent -0.94,-0.5 0.94,0.5, body extent -0.5,-0.25 0.5,0.25
0402WGF6801TCE [mm] "Resistors. -55C~+155C 50V 6.8kohm 62.5mW Thick Film Resistor +/-1% +/-100ppm/C 0402 Chip Resistor - Surface Mount ROHS"
  rect 0.566x0.54 smd: 1(-0.433,0) 2(0.433,0)
  silkscreen extent -0.94,-0.27 0.91,0.5, body extent -0.5,-0.25 0.5,0.25
0603WAF1005T5E [mm] "Resistors. -55C~+155C 100mW 10Mohm 75V Thick Film Resistor +/-1% +/-100ppm/C 0603 Chip Resistor - Surface Mount ROHS"
  rect 0.806x0.864 smd: 1(-0.753,0) 2(0.753,0)
  silkscreen extent -1.39,-0.66 1.39,0.66, body extent -0.81,-0.4 0.81,0.4
0603WAF2203T5E [mm] "Resistors. -55C~+155C 100mW 220kohm 75V Thick Film Resistor +/-1% +/-100ppm/C 0603 Chip Resistor - Surface Mount ROHS"
  rect 0.806x0.864 smd: 1(-0.753,0) 2(0.753,0)
  silkscreen extent -1.39,-0.66 1.39,0.66, body extent -0.81,-0.4 0.81,0.4
0603WAF2204T5E [mm] "Resistors. -55C~+155C 100mW 2.2Mohm 75V Thick Film Resistor +/-1% +/-100ppm/C 0603 Chip Resistor - Surface Mount ROHS"
  rect 0.806x0.864 smd: 1(-0.753,0) 2(0.753,0)
  silkscreen extent -1.39,-0.66 1.39,0.66, body extent -0.81,-0.4 0.81,0.4
0603WAF2402T5E [mm] "Resistors. -55C~+155C 100mW 24kohm 75V Thick Film Resistor +/-1% +/-100ppm/C 0603 Chip Resistor - Surface Mount ROHS"
  rect 0.806x0.864 smd: 1(-0.753,0) 2(0.753,0)
  silkscreen extent -1.39,-0.66 1.39,0.66, body extent -0.81,-0.4 0.81,0.4
0603WAF3303T5E [mm] "Resistors. -55C~+155C 100mW 330kohm 75V Thick Film Resistor +/-1% +/-100ppm/C 0603 Chip Resistor - Surface Mount ROHS"
  rect 0.806x0.864 smd: 1(-0.753,0) 2(0.753,0)
  silkscreen extent -1.39,-0.66 1.39,0.66, body extent -0.81,-0.4 0.81,0.4
1206B224K251NT [mm] "Multilayer Ceramic Capacitors MLCC - SMD/SMT. 220nF 250V X7R +/-10% 1206 Multilayer Ceramic Capacitors MLCC - SMD/SMT ROHS"
  rect 1.485x1.728 smd: 1(-1.593,0) 2(1.593,0)
  silkscreen extent -2.56,-1.09 2.56,1.09, body extent -1.6,-0.8 1.6,0.8
BH-AAA-A1AJ024 [mm] "Battery Connectors. -10~100C Battery holder Nickel plated No. 7 - ROHS"
  round 1.9 hole 1.2: 1(0,5.8) 2(0,-5.8)
  silkscreen extent -49.85,-12.74 2.22,24.34
"CAP 0805_2012" [mm] "Chip Capacitor, 2-Leads, Body 2.00x1.20mm, IPC Medium Density"
  rect 1.3x1.4 smd: 1(-0.8,0) 2(0.8,0)
  silkscreen extent -1.7,-0.9 1.7,0.9, body extent -1,-0.64 1,0.64, height 1.26
CAPC1050X55X23ML05T13 [mm] "Chip Capacitor, 2-Leads, Body 1.05x0.55mm, IPC Low Density"
  rect 0.76x0.72 smd: 1(-0.49,0) 2(0.49,0)
  body extent -0.53,-0.28 0.53,0.27, height 0.55
CL05B224KO5NNNC [mm] "Multilayer Ceramic Capacitors MLCC - SMD/SMT. 16V 220nF X7R +/-10% 0402 Multilayer Ceramic Capacitors MLCC - SMD/SMT ROHS"
  rect 0.5x0.54 smd: 1(-0.42,0) 2(0.42,0)
  body extent -0.5,-0.25 0.5,0.25
CL10B474KA8NNNC [mm] "Multilayer Ceramic Capacitors MLCC - SMD/SMT. 25V 470nF X7R +/-10% 0603 Multilayer Ceramic Capacitors MLCC - SMD/SMT ROHS"
  rect 0.8x0.9 smd: 1(-0.7,0) 2(0.7,0)
  body extent -0.8,-0.4 0.8,0.4
CL21A476MQYNNNE [mm] "Multilayer Ceramic Capacitors MLCC - SMD/SMT. 47uF 6.3V X5R +/-20% 0805 Multilayer Ceramic Capacitors MLCC - SMD/SMT ROHS"
  rect 1.41x1.35 smd: 1(-1,0) 2(1,0)
  silkscreen extent -1.96,-0.75 1.96,0.9, body extent -1,-0.65 1,0.65